# EAGLE board MotorBoard-panel (EAGLE 7.2.0), part 1 of 4
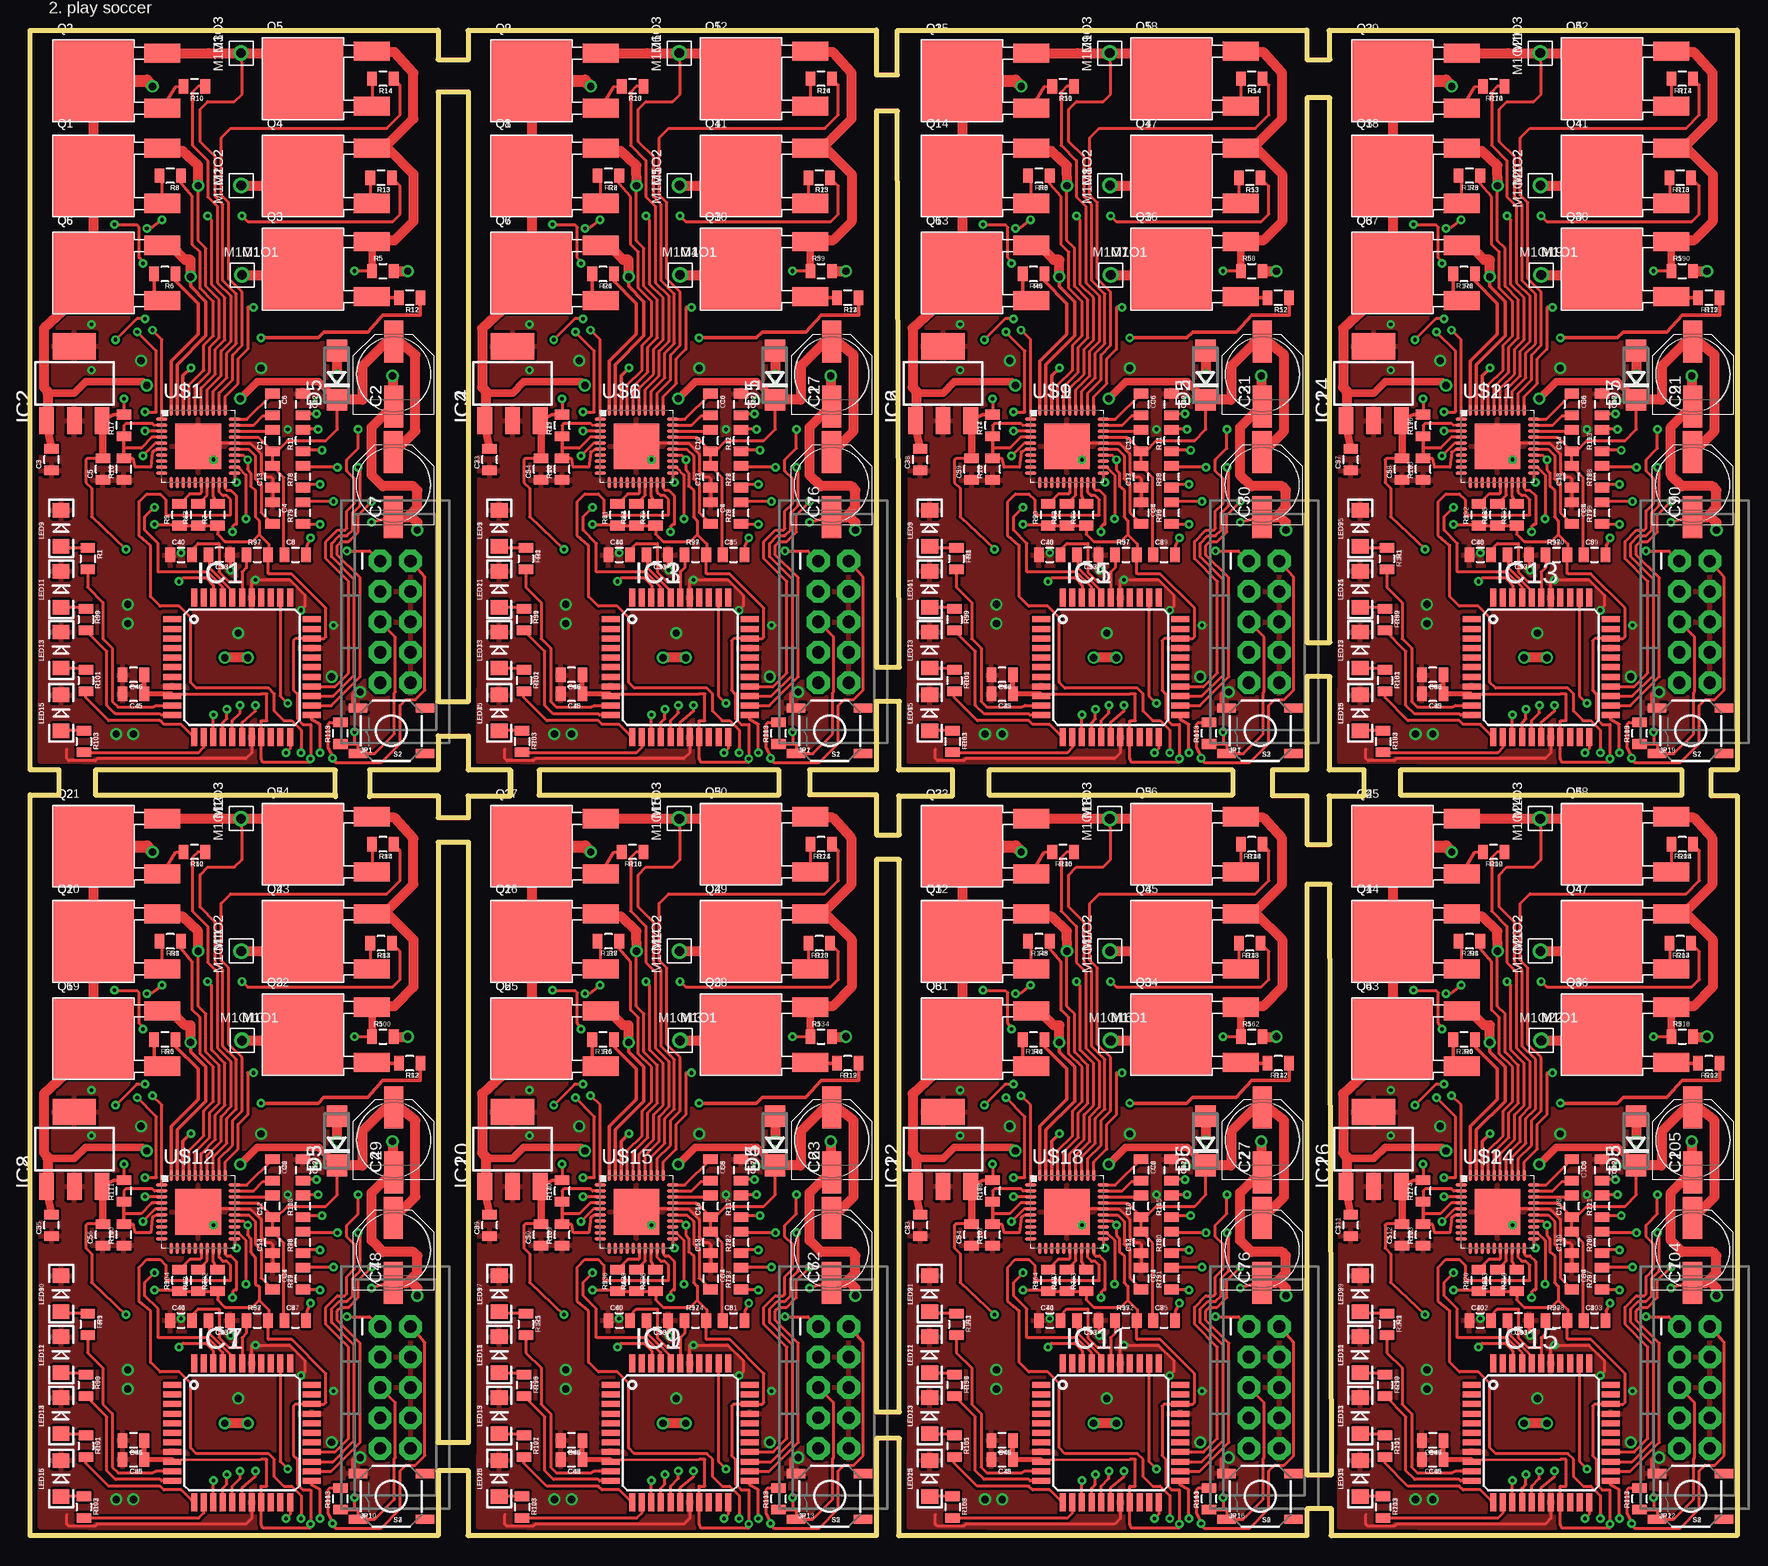
[diagram p0: board, top side]
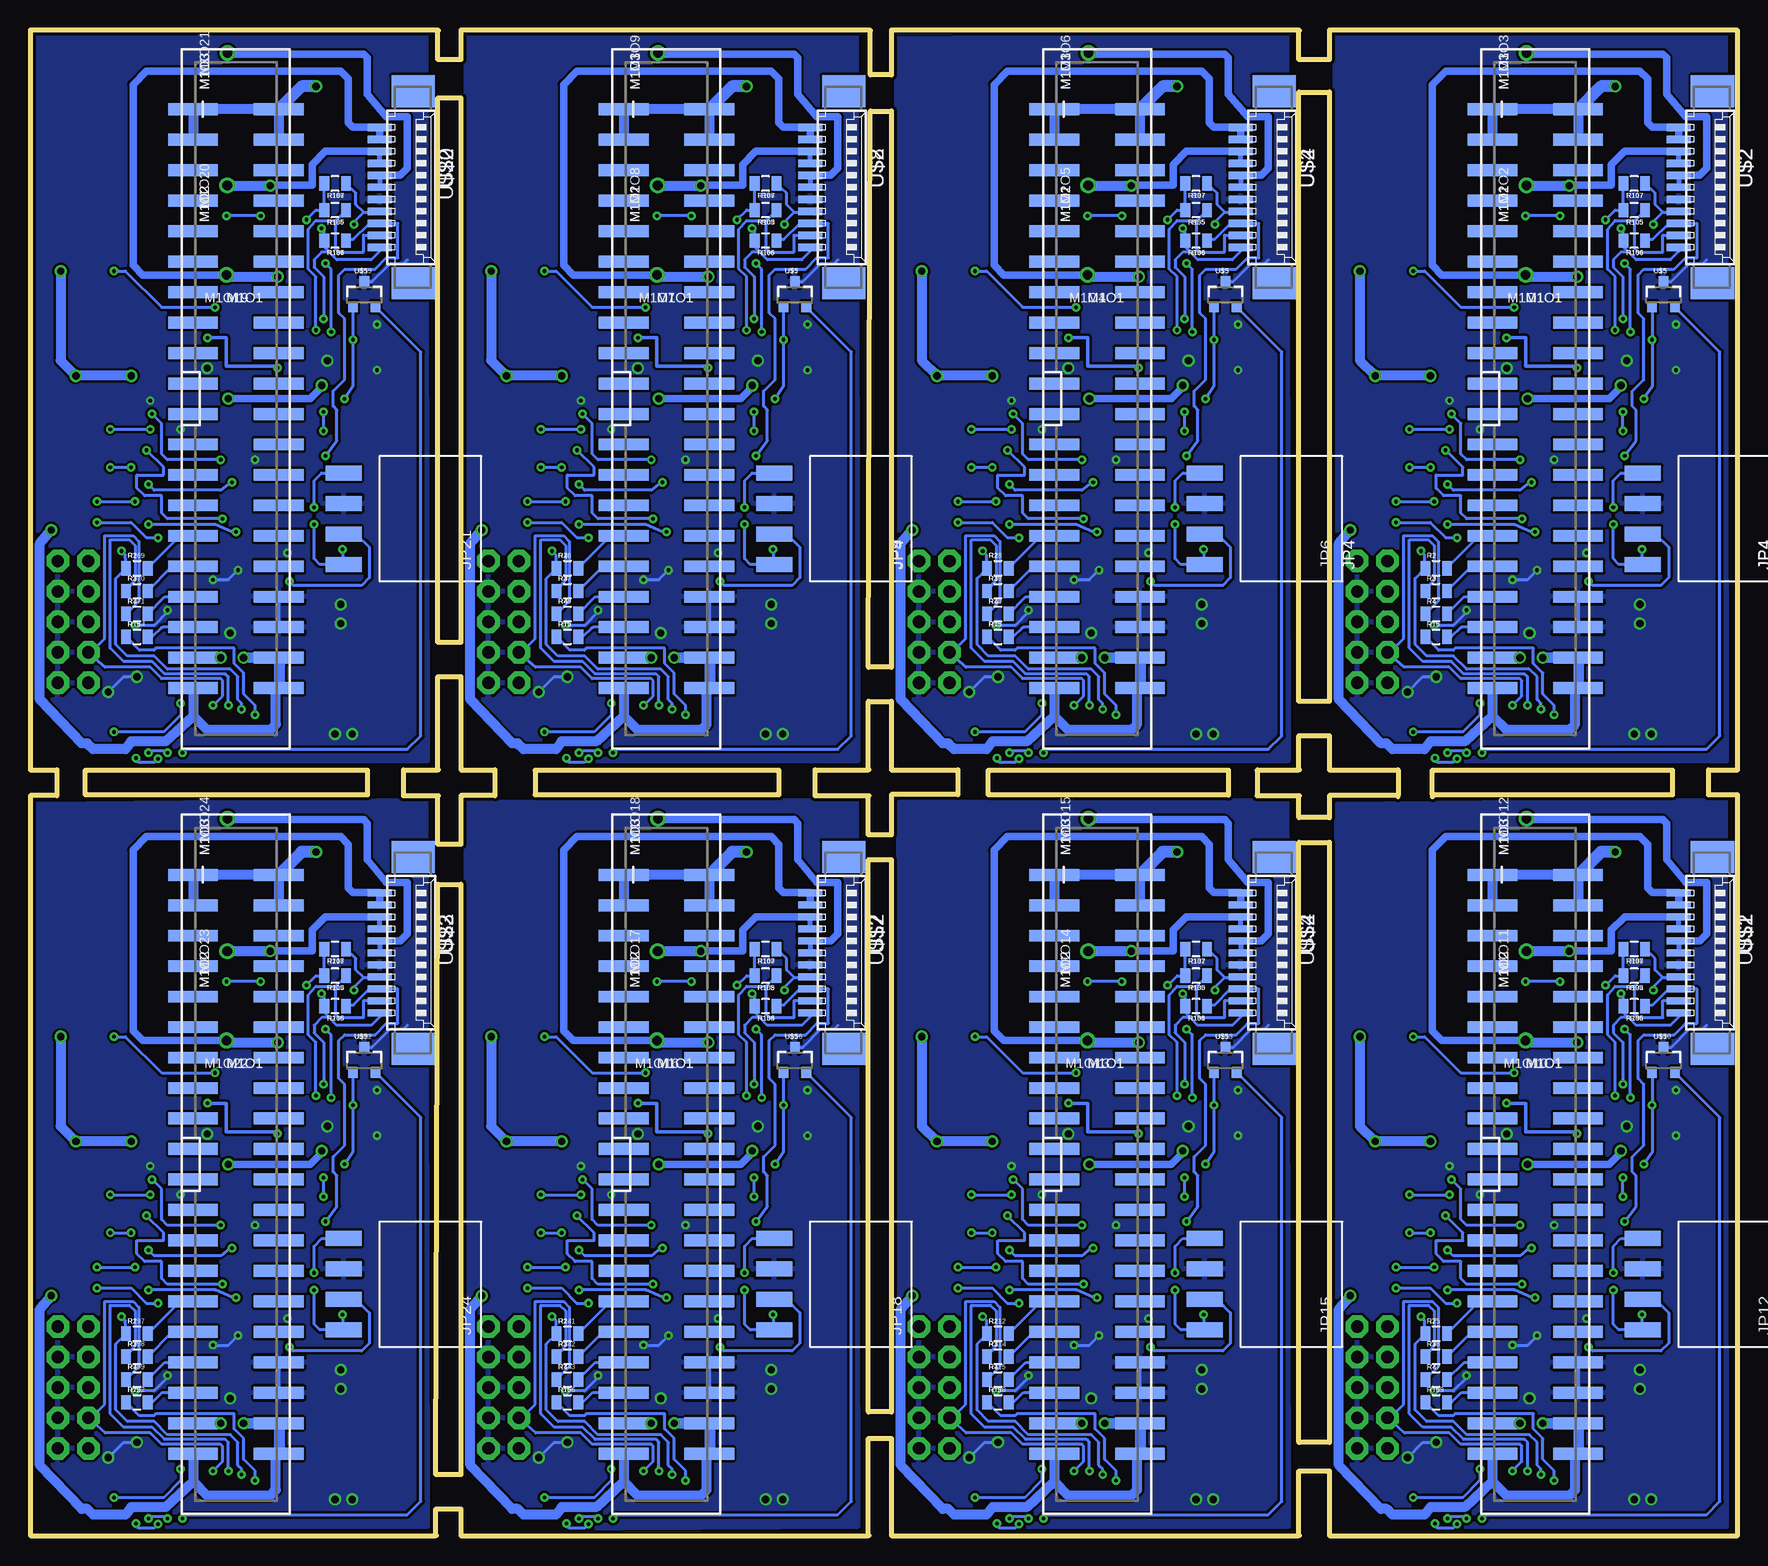
[diagram p1: board, bottom side, seen from below]

Size 142.27 x 125.5 mm. Coordinates in mm from the lower left corner, seen from the top.
Outline: 25.45,61.74 25.45,63.81 5.45,63.81 5.45,61.74 25.45,61.74
Outline: 36.51,63.82 36.56,63.82
Outline: 36.56,63.82 36.56,66.67 34.02,66.67 34.02,63.82 28.3,63.82 28.3,61.68
Outline: 64.98,61.76 64.98,61.74
Outline: 42.43,61.74 42.43,61.7
Outline: 40.01,61.7 40.01,63.82 36.56,63.82
Outline: 72.39,63.82 72.44,63.82
Outline: 72.44,63.82 72.44,69.52 70.53,69.52 70.53,63.82 64.98,63.82 64.98,61.76
Outline: 103.55,63.82 106.41,63.82 106.41,71.59 108.31,71.59 108.31,63.82
Outline: 76.88,61.74 76.88,63.82 72.44,63.82
Outline: 25.45,61.74 25.45,61.59
Outline: 28.3,61.59 28.3,61.68
Outline: 28.3,61.68 34.02,61.68 34.02,59.84 36.56,59.84 36.56,61.66
Outline: 36.51,0 36.56,0
Outline: 36.56,0 36.56,5.39 34.02,5.39 34.02,0 0,0 0,61.74 2.43,61.74 2.43,63.82 0,63.82 0,125.48 34,125.5 34.02,125.5 34.02,123.02 36.56,123.02 36.56,125.48 36.51,125.48 70.51,125.5 70.53,125.5 70.53,121.75 72.28,121.75 72.28,125.48 72.39,125.48 106.39,125.5 106.41,125.5 106.41,123.02 108.31,123.02 108.31,125.48 108.27,125.48 142.27,125.5 142.27,63.82 140.06,63.82
Outline: 36.56,61.66 36.51,61.66
Outline: 36.56,61.66 40.05,61.66 40.05,63.81
Outline: 42.43,61.74 42.43,63.81 62.44,63.81 62.44,61.74 42.43,61.74
Outline: 64.98,61.76 70.53,61.76 70.53,58.41 72.44,58.41 72.44,61.66
Outline: 36.56,0 70.53,0 70.53,8.09 72.44,8.09 72.44,0
Outline: 72.39,0 72.44,0
Outline: 72.44,61.66 72.39,61.66
Outline: 72.44,61.66 76.88,61.66 76.88,63.81
Outline: 103.55,63.81 103.55,61.68 106.41,61.68 106.41,57.62 108.31,57.62 108.31,61.66
Outline: 72.44,0 106.41,0 106.41,2.21 108.47,2.21 108.47,0
Outline: 108.27,63.82 108.31,63.82
Outline: 111.17,61.74 111.17,63.82 108.31,63.82
Outline: 108.43,0 108.47,0
Outline: 108.31,61.66 108.27,61.66
Outline: 108.31,61.66 111.17,61.66 111.17,63.81
Outline: 140.06,63.81 140.06,61.68 142.27,61.68 142.27,0 108.47,0
Outline: 34.02,120.32 34.02,69.52 36.56,69.52 36.56,120.32 34.02,120.32
Outline: 70.53,118.74 70.53,72.38 72.44,72.38 72.28,118.74 70.53,118.74
Outline: 106.41,119.85 106.41,74.44 108.31,74.44 108.31,119.85 106.41,119.85
Outline: 100.22,63.81 79.9,63.81 79.9,61.74 100.22,61.74 100.22,63.81
Outline: 34.02,57.78 34.02,7.77 36.56,7.77 36.56,57.78 34.02,57.78
Outline: 70.53,56.35 70.53,10.31 72.44,10.31 72.44,56.35 70.53,56.35
Outline: 106.41,54.28 106.41,5.07 108.47,5.07 108.47,5.23 108.31,54.28 106.41,54.28
Outline: 137.68,63.81 114.19,63.81 114.19,61.74 137.68,61.74 137.68,63.81
Copper layers (1*16): Top 0.035mm / dielectric 1.5mm / Bottom 0.035mm
Design rules "SparkFun": minimum track width 8mil, minimum drill 10mil, track to track 8mil, track to pad 8mil, pad to pad 8mil, via to via 8mil, smd to smd 8mil, copper to edge 10mil, drill to drill 8mil, minimum pad ring 10mil, minimum via ring 8mil, stop-mask expansion 4mil, vias tented up to drill 0mil, thermal gap 10mil

## Footprints (pad centres in the part's own frame; a part is rotated, then mirrored left to right if it is on the bottom)
0805 = smd 0.8 x 1.2: 1 -0.9,0; 2 0.9,0
PANASONIC_D = smd 3.5 x 1.6: + 2.7,0; - -2.7,0
DO214AC = smd 1.8 x 1.7: A 2.05,0; C -2.05,0
TQFP44 = smd 1.5 x 0.5: 1 -5.8,4; 2 -5.8,3.2; 3 -5.8,2.4; 4 -5.8,1.6; 5 -5.8,0.8; 6 -5.8,0; 7 -5.8,-0.8; 8 -5.8,-1.6; 9 -5.8,-2.4; 10 -5.8,-3.2; 11 -5.8,-4; 23 5.8,-4; 24 5.8,-3.2; 25 5.8,-2.4; 26 5.8,-1.6; 27 5.8,-0.8; 28 5.8,0; 29 5.8,0.8; 30 5.8,1.6; 31 5.8,2.4; 32 5.8,3.2; 33 5.8,4 | smd 0.5 x 1.5: 12 -4,-5.8; 13 -3.2,-5.8; 14 -2.4,-5.8; 15 -1.6,-5.8; 16 -0.8,-5.8; 17 0,-5.8; 18 0.8,-5.8; 19 1.6,-5.8; 20 2.4,-5.8; 21 3.2,-5.8; 22 4,-5.8; 34 4,5.8; 35 3.2,5.8; 36 2.4,5.8; 37 1.6,5.8; 38 0.8,5.8; 39 0,5.8; 40 -0.8,5.8; 41 -1.6,5.8; 42 -2.4,5.8; 43 -3.2,5.8; 44 -4,5.8
SOT223 = smd 1.219 x 2.235: 1 -2.311,-3.099; 2 0,-3.099; 3 2.311,-3.099 | smd 3.6 x 2.2: 4 0,3.099
2X5-SHROUDED-NS = drill 1.016 pad 1.88 octagon: 1 -1.27,5.08; 2 1.27,5.08; 3 -1.27,2.54; 4 1.27,2.54; 5 -1.27,0; 6 1.27,0; 7 -1.27,-2.54; 8 1.27,-2.54; 9 -1.27,-5.08; 10 1.27,-5.08
2X20_SHROUDED_SMT = smd 4.14 x 0.991: 1 -3.569,24.13; 2 3.569,24.13; 3 -3.569,21.59; 4 3.569,21.59; 5 -3.569,19.05; 6 3.569,19.05; 7 -3.569,16.51; 8 3.569,16.51; 9 -3.569,13.97; 10 3.569,13.97; 11 -3.569,11.43; 12 3.569,11.43; 13 -3.569,8.89; 14 3.569,8.89; 15 -3.569,6.35; 16 3.569,6.35; 17 -3.569,3.81; 18 3.569,3.81; 19 -3.569,1.27; 20 3.569,1.27; 21 -3.569,-1.27; 22 3.569,-1.27; 23 -3.569,-3.81; 24 3.569,-3.81; 25 -3.569,-6.35; 26 3.569,-6.35; 27 -3.569,-8.89; 28 3.569,-8.89; 29 -3.569,-11.43; 30 3.569,-11.43; 31 -3.569,-13.97; 32 3.569,-13.97; 33 -3.569,-16.51; 34 3.569,-16.51; 35 -3.569,-19.05; 36 3.569,-19.05; 37 -3.569,-21.59; 38 3.569,-21.59; 39 -3.569,-24.13; 40 3.569,-24.13
1X04_SMD_RA_FEMALE = smd 1.25 x 3: 1 -3.81,7.225; 2 -1.27,7.225; 3 1.27,7.225; 4 3.81,7.225
LED-1206 = smd 1.2 x 1.4: A -1.5,0; C 1.5,0
TESTING_PT = drill 0.8: P$1 0,0
DPAK = smd 6.7 x 6.7: DRAIN 0,0 | smd 3 x 1.6: GATE 5.75,-2.3; SOURCE 5.75,2.3
TACTILE-SWITCH-SMD = smd 1.524 x 0.762: 1 -2.794,1.905; 2 2.794,1.905; 3 -2.794,-1.905; 4 2.794,-1.905
QFN40-6X6 = smd 0.95 x 0.28: 1 -3.025,2.25; 2 -3.025,1.75; 3 -3.025,1.25; 4 -3.025,0.75; 5 -3.025,0.25; 6 -3.025,-0.25; 7 -3.025,-0.75; 8 -3.025,-1.25; 9 -3.025,-1.75; 10 -3.025,-2.25; 21 3.025,-2.25; 22 3.025,-1.75; 23 3.025,-1.25; 24 3.025,-0.75; 25 3.025,-0.25; 26 3.025,0.25; 27 3.025,0.75; 28 3.025,1.25; 29 3.025,1.75; 30 3.025,2.25 | smd 0.28 x 0.95: 11 -2.25,-3.025; 12 -1.75,-3.025; 13 -1.25,-3.025; 14 -0.75,-3.025; 15 -0.25,-3.025; 16 0.25,-3.025; 17 0.75,-3.025; 18 1.25,-3.025; 19 1.75,-3.025; 20 2.25,-3.025; 31 2.25,3.025; 32 1.75,3.025; 33 1.25,3.025; 34 0.75,3.025; 35 0.25,3.025; 36 -0.25,3.025; 37 -0.75,3.025; 38 -1.25,3.025; 39 -1.75,3.025; 40 -2.25,3.025 | smd 3.81 x 3.81: P$3 0,0
GEN3CON = smd 0.61 x 2: 1 5,-2; 2 4,-2; 3 3,-2; 4 2,-2; 5 1,-2; 7 -1,-2; 8 -2,-2; 9 -3,-2; 10 -4,-2; 11 -5,-2 | smd 0.6 x 2: 6 0,-2 | smd 2.68 x 3.6: S1 8,0.8; S2 -8,0.8
SOT23-3 = smd 0.8 x 0.9: 1 -0.95,-1; 2 0.95,-1; 3 0,1.1

## Placement (x,y rotation side)
C1  1uF  [0805]  20.21,91.27 90 top
C2  100uF  [PANASONIC_D]  30.3,96.8 90 top
C3  .1uF  [0805]  1.79,89.68 90 top
C4  1uF  [0805]  20.21,85.24 270 top
C5  .1uF  [0805]  6.08,88.89 90 top
C6  1uF  [0805]  20.21,94.29 270 top
C7  100uF  [PANASONIC_D]  30.28,87.59 90 top
C8  .1uF  [0805]  22.11,81.75 0 top
C9  1uF  [0805]  56.72,85.24 270 top
C10  1uF  [0805]  56.72,94.29 270 top
C11  .1uF  [0805]  52.28,81.75 180 top
C12  .1uF  [0805]  22.75,94.29 270 top
C13  0.1uF  [0805]  20.21,88.25 90 top
C14  .1uF  [0805]  49.1,81.75 0 top
C15  .1uF  [0805]  58.63,81.75 0 top
C16  100uF  [PANASONIC_D]  66.79,87.59 90 top
C17  100uF  [PANASONIC_D]  66.82,96.8 90 top
C18  1uF  [0805]  45.13,70.16 180 top
C19  .01uF  [0805]  45.13,71.74 180 top
C20  1uF  [0805]  56.72,91.27 90 top
C21  .1uF  [0805]  59.26,94.29 270 top
C22  0.1uF  [0805]  56.72,88.25 90 top
C23  .1uF  [0805]  38.31,89.68 90 top
C24  .1uF  [0805]  42.59,88.89 90 top
C25  1uF  [0805]  92.6,85.24 270 top
C26  1uF  [0805]  92.6,94.29 270 top
C27  .1uF  [0805]  88.15,81.75 180 top
C28  .1uF  [0805]  84.98,81.75 0 top
C29  .1uF  [0805]  94.5,81.75 0 top
C30  100uF  [PANASONIC_D]  102.67,87.59 90 top
C31  100uF  [PANASONIC_D]  102.69,96.8 90 top
C32  1uF  [0805]  81.01,70.16 180 top
C33  .1uF  [0805]  15.76,81.75 180 top
C34  .01uF  [0805]  81.01,71.74 180 top
C35  1uF  [0805]  92.6,91.27 90 top
C36  .1uF  [0805]  95.14,94.29 270 top
C37  0.1uF  [0805]  92.6,88.25 90 top
C38  .1uF  [0805]  74.18,89.68 90 top
C39  .1uF  [0805]  78.47,88.89 90 top
C40  .1uF  [0805]  12.59,81.75 0 top
C41  1uF  [0805]  20.21,21.42 270 top
C42  1uF  [0805]  20.21,30.47 270 top
C43  .1uF  [0805]  15.76,17.93 180 top
C44  .1uF  [0805]  12.59,17.93 0 top
C45  1uF  [0805]  8.62,70.16 180 top
C46  .01uF  [0805]  8.62,71.74 180 top
C47  .1uF  [0805]  22.11,17.93 0 top
C48  100uF  [PANASONIC_D]  30.28,23.78 90 top
C49  100uF  [PANASONIC_D]  30.3,32.98 90 top
C50  1uF  [0805]  8.62,6.34 180 top
C51  .01uF  [0805]  8.62,7.93 180 top
C52  1uF  [0805]  20.21,27.45 90 top
C53  .1uF  [0805]  22.75,30.47 270 top
C54  0.1uF  [0805]  20.21,24.44 90 top
C55  .1uF  [0805]  1.79,25.87 90 top
C56  .1uF  [0805]  6.08,25.07 90 top
C57  1uF  [0805]  56.72,21.42 270 top
C58  1uF  [0805]  56.72,30.47 270 top
C59  .1uF  [0805]  52.28,17.93 180 top
C60  .1uF  [0805]  49.1,17.93 0 top
C61  .1uF  [0805]  58.63,17.93 0 top
C62  100uF  [PANASONIC_D]  66.79,23.78 90 top
C63  100uF  [PANASONIC_D]  66.82,32.98 90 top
C64  1uF  [0805]  45.13,6.34 180 top
C65  .01uF  [0805]  45.13,7.93 180 top
C66  1uF  [0805]  56.72,27.45 90 top
C67  .1uF  [0805]  59.26,30.47 270 top
C68  0.1uF  [0805]  56.72,24.44 90 top
C69  .1uF  [0805]  38.31,25.87 90 top
C70  .1uF  [0805]  42.59,25.07 90 top
C71  1uF  [0805]  92.6,21.42 270 top
C72  1uF  [0805]  92.6,30.47 270 top
C73  .1uF  [0805]  88.15,17.93 180 top
C74  .1uF  [0805]  84.98,17.93 0 top
C75  .1uF  [0805]  94.5,17.93 0 top
C76  100uF  [PANASONIC_D]  102.67,23.78 90 top
C77  100uF  [PANASONIC_D]  102.69,32.98 90 top
C78  1uF  [0805]  81.01,6.34 180 top
C79  .01uF  [0805]  81.01,7.93 180 top
C80  1uF  [0805]  92.6,27.45 90 top
C81  .1uF  [0805]  95.14,30.47 270 top
C82  0.1uF  [0805]  92.6,24.44 90 top
C83  .1uF  [0805]  74.18,25.87 90 top
C84  .1uF  [0805]  78.47,25.07 90 top
C85  1uF  [0805]  128.48,85.24 270 top
C86  1uF  [0805]  128.48,94.29 270 top
C87  .1uF  [0805]  124.03,81.75 180 top
C88  .1uF  [0805]  120.86,81.75 0 top
C89  .1uF  [0805]  130.38,81.75 0 top
C90  100uF  [PANASONIC_D]  138.55,87.59 90 top
C91  100uF  [PANASONIC_D]  138.57,96.8 90 top
C92  1uF  [0805]  116.89,70.16 180 top
C93  .01uF  [0805]  116.89,71.74 180 top
C94  1uF  [0805]  128.48,91.27 90 top
C95  .1uF  [0805]  131.02,94.29 270 top
C96  0.1uF  [0805]  128.48,88.25 90 top
C97  .1uF  [0805]  110.06,89.68 90 top
C98  .1uF  [0805]  114.35,88.89 90 top
C99  1uF  [0805]  128.48,21.42 270 top
C100  1uF  [0805]  128.48,30.47 270 top
C101  .1uF  [0805]  124.03,17.93 180 top
C102  .1uF  [0805]  120.86,17.93 0 top
C103  .1uF  [0805]  130.38,17.93 0 top
C104  100uF  [PANASONIC_D]  138.55,23.78 90 top
C105  100uF  [PANASONIC_D]  138.57,32.98 90 top
C106  1uF  [0805]  116.89,6.34 180 top
C107  .01uF  [0805]  116.89,7.93 180 top
C108  1uF  [0805]  128.48,27.45 90 top
C109  .1uF  [0805]  131.02,30.47 270 top
C110  0.1uF  [0805]  128.48,24.44 90 top
C111  .1uF  [0805]  110.06,25.87 90 top
C112  .1uF  [0805]  114.35,25.07 90 top
D1  DIODE-ZENERDO214AC  [DO214AC]  62.09,96.72 90 top
D2  DIODE-ZENERDO214AC  [DO214AC]  97.97,96.72 90 top
D3  DIODE-ZENERDO214AC  [DO214AC]  25.58,32.91 90 top
D4  DIODE-ZENERDO214AC  [DO214AC]  62.09,32.91 90 top
D5  DIODE-ZENERDO214AC  [DO214AC]  25.58,96.72 90 top
D6  DIODE-ZENERDO214AC  [DO214AC]  97.97,32.91 90 top
D7  DIODE-ZENERDO214AC  [DO214AC]  133.85,96.72 90 top
D8  DIODE-ZENERDO214AC  [DO214AC]  133.85,32.91 90 top
FRAME7  FRAME-LETTER  [CREATIVE_COMMONS]  -67.92,133.99 0 top  (outside the outline)
GEN_4_REV_A  Fall 2015  [LOGO]  3.54,133.22 0 top  (outside the outline)
IC1  XMEGA16A4A  [TQFP44]  17.67,72.38 0 top
IC2  [SOT223]  3.7,96.03 0 top
IC3  XMEGA16A4A  [TQFP44]  54.18,72.38 0 top
IC4  [SOT223]  40.21,96.03 0 top
IC5  XMEGA16A4A  [TQFP44]  90.06,72.38 0 top
IC6  [SOT223]  76.09,96.03 0 top
IC7  XMEGA16A4A  [TQFP44]  17.67,8.56 0 top
IC8  [SOT223]  3.7,32.22 0 top
IC9  XMEGA16A4A  [TQFP44]  54.18,8.56 0 top
IC10  [SOT223]  40.21,32.22 0 top
IC11  XMEGA16A4A  [TQFP44]  90.06,8.56 0 top
IC12  [SOT223]  76.09,32.22 0 top
IC13  XMEGA16A4A  [TQFP44]  125.94,72.38 0 top
IC14  [SOT223]  111.97,96.03 0 top
IC15  XMEGA16A4A  [TQFP44]  125.94,8.56 0 top
IC16  [SOT223]  111.97,32.22 0 top
JP1  [2X5-SHROUDED-NS]  30.45,76.16 0 top
JP2  [2X5-SHROUDED-NS]  66.96,76.16 0 top
JP3  M20X2SHROUDED_SMT  [2X20_SHROUDED_SMT]  16.88,94.76 0 bottom
JP4  [1X04_SMD_RA_FEMALE]  0.68,84.76 90 bottom
JP5  M20X2SHROUDED_SMT  [2X20_SHROUDED_SMT]  53.39,94.76 0 bottom
JP6  [1X04_SMD_RA_FEMALE]  37.2,84.76 90 bottom
JP7  [2X5-SHROUDED-NS]  102.83,76.16 0 top
JP8  M20X2SHROUDED_SMT  [2X20_SHROUDED_SMT]  89.27,94.76 0 bottom
JP9  [1X04_SMD_RA_FEMALE]  73.07,84.76 90 bottom
JP10  [2X5-SHROUDED-NS]  30.45,12.34 0 top
JP11  M20X2SHROUDED_SMT  [2X20_SHROUDED_SMT]  16.88,30.95 0 bottom
JP12  [1X04_SMD_RA_FEMALE]  0.68,20.94 90 bottom
JP13  [2X5-SHROUDED-NS]  66.96,12.34 0 top
JP14  M20X2SHROUDED_SMT  [2X20_SHROUDED_SMT]  53.39,30.95 0 bottom
JP15  [1X04_SMD_RA_FEMALE]  37.2,20.94 90 bottom
JP16  [2X5-SHROUDED-NS]  102.83,12.34 0 top
JP17  M20X2SHROUDED_SMT  [2X20_SHROUDED_SMT]  89.27,30.95 0 bottom
JP18  [1X04_SMD_RA_FEMALE]  73.07,20.94 90 bottom
JP19  [2X5-SHROUDED-NS]  138.71,76.16 0 top
JP20  M20X2SHROUDED_SMT  [2X20_SHROUDED_SMT]  125.14,94.76 0 bottom
JP21  [1X04_SMD_RA_FEMALE]  108.95,84.76 90 bottom
JP22  [2X5-SHROUDED-NS]  138.71,12.34 0 top
JP23  M20X2SHROUDED_SMT  [2X20_SHROUDED_SMT]  125.14,30.95 0 bottom
JP24  [1X04_SMD_RA_FEMALE]  108.95,20.94 90 bottom
LED1  [LED-1206]  39.1,83.97 90 top
LED2  [LED-1206]  39.1,78.89 90 top
LED3  [LED-1206]  39.1,73.81 90 top
LED4  [LED-1206]  39.1,68.57 90 top
LED5  [LED-1206]  74.98,83.97 90 top
LED6  [LED-1206]  74.98,78.89 90 top
LED7  [LED-1206]  74.98,73.81 90 top
LED8  [LED-1206]  74.98,68.57 90 top
LED9  [LED-1206]  2.59,83.97 90 top
LED10  [LED-1206]  2.59,20.15 90 top
LED11  [LED-1206]  2.59,78.89 90 top
LED12  [LED-1206]  2.59,15.07 90 top
LED13  [LED-1206]  2.59,73.81 90 top
LED14  [LED-1206]  2.59,9.99 90 top
LED15  [LED-1206]  2.59,68.57 90 top
LED16  [LED-1206]  2.59,4.75 90 top
LED17  [LED-1206]  39.1,20.15 90 top
LED18  [LED-1206]  39.1,15.07 90 top
LED19  [LED-1206]  39.1,9.99 90 top
LED20  [LED-1206]  39.1,4.75 90 top
LED21  [LED-1206]  74.98,20.15 90 top
LED22  [LED-1206]  74.98,15.07 90 top
LED23  [LED-1206]  74.98,9.99 90 top
LED24  [LED-1206]  74.98,4.75 90 top
LED25  [LED-1206]  110.86,83.97 90 top
LED26  [LED-1206]  110.86,78.89 90 top
LED27  [LED-1206]  110.86,73.81 90 top
LED28  [LED-1206]  110.86,68.57 90 top
LED29  [LED-1206]  110.86,20.15 90 top
LED30  [LED-1206]  110.86,15.07 90 top
LED31  [LED-1206]  110.86,9.99 90 top
LED32  [LED-1206]  110.86,4.75 90 top
M1O1  TEST_PT  [TESTING_PT]  17.67,105.08 0 top
M1O2  TEST_PT  [TESTING_PT]  17.6,112.53 90 top
M1O3  TEST_PT  [TESTING_PT]  17.59,123.58 90 top
M1O4  TEST_PT  [TESTING_PT]  54.18,105.08 0 top
M1O5  TEST_PT  [TESTING_PT]  54.12,112.53 90 top
M1O6  TEST_PT  [TESTING_PT]  54.1,123.58 90 top
M1O7  TEST_PT  [TESTING_PT]  90.06,105.08 0 top
M1O8  TEST_PT  [TESTING_PT]  89.99,112.53 90 top
M1O9  TEST_PT  [TESTING_PT]  89.98,123.58 90 top
M1O10  TEST_PT  [TESTING_PT]  17.67,41.26 0 top
M1O11  TEST_PT  [TESTING_PT]  17.6,48.71 90 top
M1O12  TEST_PT  [TESTING_PT]  17.59,59.76 90 top
M1O13  TEST_PT  [TESTING_PT]  54.18,41.26 0 top
M1O14  TEST_PT  [TESTING_PT]  54.12,48.71 90 top
M1O15  TEST_PT  [TESTING_PT]  54.1,59.76 90 top
M1O16  TEST_PT  [TESTING_PT]  90.06,41.26 0 top
M1O17  TEST_PT  [TESTING_PT]  89.99,48.71 90 top
M1O18  TEST_PT  [TESTING_PT]  89.98,59.76 90 top
M1O19  TEST_PT  [TESTING_PT]  125.94,105.08 0 top
M1O20  TEST_PT  [TESTING_PT]  125.87,112.53 90 top
M1O21  TEST_PT  [TESTING_PT]  125.86,123.58 90 top
M1O22  TEST_PT  [TESTING_PT]  125.94,41.26 0 top
M1O23  TEST_PT  [TESTING_PT]  125.87,48.71 90 top
M1O24  TEST_PT  [TESTING_PT]  125.86,59.76 90 top
Q1  [DPAK]  5.29,113.34 0 top
Q2  [DPAK]  5.29,121.27 0 top
Q3  [DPAK]  22.75,105.56 0 top
Q4  [DPAK]  22.75,113.34 0 top
Q5  [DPAK]  22.75,121.43 0 top
Q6  [DPAK]  5.29,105.24 0 top
Q7  [DPAK]  41.8,105.24 0 top
Q8  [DPAK]  41.8,113.34 0 top
Q9  [DPAK]  41.8,121.27 0 top
Q10  [DPAK]  59.26,105.56 0 top
Q11  [DPAK]  59.26,113.34 0 top
Q12  [DPAK]  59.26,121.43 0 top
Q13  [DPAK]  77.68,105.24 0 top
Q14  [DPAK]  77.68,113.34 0 top
Q15  [DPAK]  77.68,121.27 0 top
Q16  [DPAK]  95.14,105.56 0 top
Q17  [DPAK]  95.14,113.34 0 top
Q18  [DPAK]  95.14,121.43 0 top
Q19  [DPAK]  5.29,41.42 0 top
Q20  [DPAK]  5.29,49.52 0 top
Q21  [DPAK]  5.29,57.46 0 top
Q22  [DPAK]  22.75,41.74 0 top
Q23  [DPAK]  22.75,49.52 0 top
Q24  [DPAK]  22.75,57.62 0 top
Q25  [DPAK]  41.8,41.42 0 top
Q26  [DPAK]  41.8,49.52 0 top
Q27  [DPAK]  41.8,57.46 0 top
Q28  [DPAK]  59.26,41.74 0 top
Q29  [DPAK]  59.26,49.52 0 top
Q30  [DPAK]  59.26,57.62 0 top
Q31  [DPAK]  77.68,41.42 0 top
Q32  [DPAK]  77.68,49.52 0 top
Q33  [DPAK]  77.68,57.46 0 top
Q34  [DPAK]  95.14,41.74 0 top
Q35  [DPAK]  95.14,49.52 0 top
Q36  [DPAK]  95.14,57.62 0 top
Q37  [DPAK]  113.55,105.24 0 top
Q38  [DPAK]  113.55,113.34 0 top
Q39  [DPAK]  113.55,121.27 0 top
Q40  [DPAK]  131.02,105.56 0 top
Q41  [DPAK]  131.02,113.34 0 top
Q42  [DPAK]  131.02,121.43 0 top
Q43  [DPAK]  113.55,41.42 0 top
Q44  [DPAK]  113.55,49.52 0 top
Q45  [DPAK]  113.55,57.46 0 top
Q46  [DPAK]  131.02,41.74 0 top
Q47  [DPAK]  131.02,49.52 0 top
Q48  [DPAK]  131.02,57.62 0 top
R1  1k  [0805]  4.81,81.43 270 top
R2  4.7k  [0805]  25.13,80.63 0 bottom
R3  4.7k  [0805]  25.13,78.73 0 bottom
R4  4.7k  [0805]  25.13,76.82 0 bottom
R5  0.05  [0805]  29.42,105.4 0 top
R6  240  [0805]  11.24,105.16 180 top
R7  30k  [0805]  15.63,85.09 90 top
R8  240  [0805]  11.69,113.35 180 top
R9  15k  [0805]  12.46,85.09 90 top
R10  240  [0805]  13.7,120.8 180 top
R11  1k  [0805]  22.75,91.27 90 top
R12  240  [0805]  31.64,103.18 180 top
R13  240  [0805]  29.26,113.18 180 top
R14  240  [0805]  29.42,121.43 180 top
R15  4.7k  [0805]  25.13,74.92 0 bottom
R16  2K  [0805]  7.83,88.89 90 top
R17  2K  [0805]  7.83,92.54 90 top
R18  4.7k  [0805]  61.64,80.63 0 bottom
R19  4.7k  [0805]  61.64,78.73 0 bottom
R20  4.7k  [0805]  61.64,76.82 0 bottom
R21  240  [0805]  47.75,105.16 180 top
R22  240  [0805]  48.2,113.35 180 top
R23  240  [0805]  50.21,120.8 180 top
R24  240  [0805]  68.15,103.18 180 top
R25  240  [0805]  65.77,113.18 180 top
R26  240  [0805]  65.93,121.43 180 top
R27  1k  [0805]  59.26,88.25 90 top
R28  1k  [0805]  59.26,85.24 90 top
R29  10k  [0805]  55.45,81.75 0 top
R30  1k  [0805]  41.32,81.43 270 top
R31  1k  [0805]  41.16,76.35 270 top
R32  1k  [0805]  41.16,71.27 270 top
R33  1k  [0805]  41.01,66.19 270 top
R34  30k  [0805]  50.54,85.09 90 top
R35  10k  [0805]  45.13,110.48 180 bottom
R36  10k  [0805]  45.13,107.94 180 bottom
R37  10k  [0805]  45.13,112.7 180 bottom
R38  10k  [0805]  62.38,66.88 90 top
R39  0.05  [0805]  65.93,105.4 0 top
R40  30k  [0805]  52.14,85.09 90 top
R41  15k  [0805]  48.97,85.09 90 top
R42  1k  [0805]  59.26,91.27 90 top
R43  4.7k  [0805]  61.64,74.92 0 bottom
R44  2K  [0805]  44.34,88.89 90 top
R45  2K  [0805]  44.34,92.54 90 top
R46  4.7k  [0805]  97.52,80.63 0 bottom
R47  4.7k  [0805]  97.52,78.73 0 bottom
R48  4.7k  [0805]  97.52,76.82 0 bottom
R49  240  [0805]  83.63,105.16 180 top
R50  240  [0805]  84.08,113.35 180 top
R51  240  [0805]  86.09,120.8 180 top
R52  240  [0805]  104.03,103.18 180 top
R53  240  [0805]  101.65,113.18 180 top
R54  240  [0805]  101.81,121.43 180 top
R55  1k  [0805]  95.14,88.25 90 top
R56  1k  [0805]  95.14,85.24 90 top
R57  10k  [0805]  91.33,81.75 0 top
R58  1k  [0805]  77.2,81.43 270 top
R59  1k  [0805]  77.04,76.35 270 top
R60  1k  [0805]  77.04,71.27 270 top
R61  1k  [0805]  76.88,66.19 270 top
R62  30k  [0805]  86.41,85.09 90 top
R63  30k  [0805]  14.02,85.09 90 top
R64  10k  [0805]  81.01,110.48 180 bottom
R65  10k  [0805]  81.01,107.94 180 bottom
R66  10k  [0805]  81.01,112.7 180 bottom
R67  10k  [0805]  98.26,66.88 90 top
R68  0.05  [0805]  101.81,105.4 0 top
R69  30k  [0805]  88.02,85.09 90 top
R70  15k  [0805]  84.85,85.09 90 top
R71  1k  [0805]  95.14,91.27 90 top
R72  4.7k  [0805]  97.52,74.92 0 bottom
R73  2K  [0805]  80.22,88.89 90 top
R74  2K  [0805]  80.22,92.54 90 top
R75  4.7k  [0805]  25.13,16.82 0 bottom
R76  4.7k  [0805]  25.13,14.91 0 bottom
R77  4.7k  [0805]  25.13,13.01 0 bottom
R78  1k  [0805]  22.75,88.25 90 top
R79  1k  [0805]  22.75,85.24 90 top
R80  240  [0805]  11.24,41.34 180 top
R81  240  [0805]  11.69,49.53 180 top
R82  240  [0805]  13.7,56.98 180 top
R83  240  [0805]  31.64,39.36 180 top
R84  240  [0805]  29.26,49.36 180 top
R85  240  [0805]  29.42,57.62 180 top
R86  1k  [0805]  22.75,24.44 90 top
R87  1k  [0805]  22.75,21.42 90 top
R88  10k  [0805]  18.94,17.93 0 top
R89  1k  [0805]  4.81,17.61 270 top
R90  1k  [0805]  4.65,12.53 270 top
R91  1k  [0805]  4.65,7.45 270 top
R92  1k  [0805]  4.49,2.37 270 top
R93  30k  [0805]  14.02,21.27 90 top
R94  10k  [0805]  8.62,46.66 180 bottom
R95  10k  [0805]  8.62,44.12 180 bottom
R96  10k  [0805]  8.62,48.88 180 bottom
R97  10k  [0805]  18.94,81.75 0 top
R98  10k  [0805]  25.87,3.06 90 top
R99  1k  [0805]  4.65,76.35 270 top
R100  0.05  [0805]  29.42,41.58 0 top
R101  1k  [0805]  4.65,71.27 270 top
R102  30k  [0805]  15.63,21.27 90 top
R103  1k  [0805]  4.49,66.19 270 top
R104  15k  [0805]  12.46,21.27 90 top
R105  10k  [0805]  8.62,110.48 180 bottom
R106  10k  [0805]  8.62,107.94 180 bottom
R107  10k  [0805]  8.62,112.7 180 bottom
R108  1k  [0805]  22.75,27.45 90 top
R109  4.7k  [0805]  25.13,11.1 0 bottom
R110  2K  [0805]  7.83,25.07 90 top
R111  2K  [0805]  7.83,28.72 90 top
R112  4.7k  [0805]  61.64,16.82 0 bottom
R113  10k  [0805]  25.87,66.88 90 top
R114  4.7k  [0805]  61.64,14.91 0 bottom
R115  4.7k  [0805]  61.64,13.01 0 bottom
R116  240  [0805]  47.75,41.34 180 top
R117  240  [0805]  48.2,49.53 180 top
R118  240  [0805]  50.21,56.98 180 top
R119  240  [0805]  68.15,39.36 180 top
R120  240  [0805]  65.77,49.36 180 top
R121  240  [0805]  65.93,57.62 180 top
R122  1k  [0805]  59.26,24.44 90 top
R123  1k  [0805]  59.26,21.42 90 top
R124  10k  [0805]  55.45,17.93 0 top
R125  1k  [0805]  41.32,17.61 270 top
R126  1k  [0805]  41.16,12.53 270 top
R127  1k  [0805]  41.16,7.45 270 top
R128  1k  [0805]  41.01,2.37 270 top
R129  30k  [0805]  50.54,21.27 90 top
R130  10k  [0805]  45.13,46.66 180 bottom
R131  10k  [0805]  45.13,44.12 180 bottom
R132  10k  [0805]  45.13,48.88 180 bottom
R133  10k  [0805]  62.38,3.06 90 top
R134  0.05  [0805]  65.93,41.58 0 top
R135  30k  [0805]  52.14,21.27 90 top
R136  15k  [0805]  48.97,21.27 90 top
R137  1k  [0805]  59.26,27.45 90 top
R138  4.7k  [0805]  61.64,11.1 0 bottom
R139  2K  [0805]  44.34,25.07 90 top
R140  2K  [0805]  44.34,28.72 90 top
R141  4.7k  [0805]  97.52,16.82 0 bottom
R142  4.7k  [0805]  97.52,14.91 0 bottom
R143  4.7k  [0805]  97.52,13.01 0 bottom
R144  240  [0805]  83.63,41.34 180 top
R145  240  [0805]  84.08,49.53 180 top
R146  240  [0805]  86.09,56.98 180 top
R147  240  [0805]  104.03,39.36 180 top
R148  240  [0805]  101.65,49.36 180 top
R149  240  [0805]  101.81,57.62 180 top
R150  1k  [0805]  95.14,24.44 90 top
R151  1k  [0805]  95.14,21.42 90 top
R152  10k  [0805]  91.33,17.93 0 top
R153  1k  [0805]  77.2,17.61 270 top
R154  1k  [0805]  77.04,12.53 270 top
R155  1k  [0805]  77.04,7.45 270 top
R156  1k  [0805]  76.88,2.37 270 top
R157  30k  [0805]  86.41,21.27 90 top
R158  10k  [0805]  81.01,46.66 180 bottom
R159  10k  [0805]  81.01,44.12 180 bottom
R160  10k  [0805]  81.01,48.88 180 bottom
R161  10k  [0805]  98.26,3.06 90 top
R162  0.05  [0805]  101.81,41.58 0 top
R163  30k  [0805]  88.02,21.27 90 top
R164  15k  [0805]  84.85,21.27 90 top
R165  1k  [0805]  95.14,27.45 90 top
R166  4.7k  [0805]  97.52,11.1 0 bottom
R167  2K  [0805]  80.22,25.07 90 top
R168  2K  [0805]  80.22,28.72 90 top
R169  4.7k  [0805]  133.4,80.63 0 bottom
R170  4.7k  [0805]  133.4,78.73 0 bottom
R171  4.7k  [0805]  133.4,76.82 0 bottom
R172  240  [0805]  119.51,105.16 180 top
R173  240  [0805]  119.95,113.35 180 top
R174  240  [0805]  121.97,120.8 180 top
R175  240  [0805]  139.91,103.18 180 top
R176  240  [0805]  137.53,113.18 180 top
R177  240  [0805]  137.68,121.43 180 top
R178  1k  [0805]  131.02,88.25 90 top
R179  1k  [0805]  131.02,85.24 90 top
R180  10k  [0805]  127.21,81.75 0 top
R181  1k  [0805]  113.08,81.43 270 top
R182  1k  [0805]  112.92,76.35 270 top
R183  1k  [0805]  112.92,71.27 270 top
R184  1k  [0805]  112.76,66.19 270 top
R185  30k  [0805]  122.29,85.09 90 top
R186  10k  [0805]  116.89,110.48 180 bottom
R187  10k  [0805]  116.89,107.94 180 bottom
R188  10k  [0805]  116.89,112.7 180 bottom
R189  10k  [0805]  134.14,66.88 90 top
R190  0.05  [0805]  137.68,105.4 0 top
R191  30k  [0805]  123.89,85.09 90 top
R192  15k  [0805]  120.73,85.09 90 top
R193  1k  [0805]  131.02,91.27 90 top
R194  4.7k  [0805]  133.4,74.92 0 bottom
R195  2K  [0805]  116.09,88.89 90 top
R196  2K  [0805]  116.09,92.54 90 top
R197  4.7k  [0805]  133.4,16.82 0 bottom
R198  4.7k  [0805]  133.4,14.91 0 bottom
R199  4.7k  [0805]  133.4,13.01 0 bottom
R200  240  [0805]  119.51,41.34 180 top
R201  240  [0805]  119.95,49.53 180 top
R202  240  [0805]  121.97,56.98 180 top
R203  240  [0805]  139.91,39.36 180 top
R204  240  [0805]  137.53,49.36 180 top
R205  240  [0805]  137.68,57.62 180 top
R206  1k  [0805]  131.02,24.44 90 top
R207  1k  [0805]  131.02,21.42 90 top
R208  10k  [0805]  127.21,17.93 0 top
R209  1k  [0805]  113.08,17.61 270 top
R210  1k  [0805]  112.92,12.53 270 top
R211  1k  [0805]  112.92,7.45 270 top
R212  1k  [0805]  112.76,2.37 270 top
R213  30k  [0805]  122.29,21.27 90 top
R214  10k  [0805]  116.89,46.66 180 bottom
R215  10k  [0805]  116.89,44.12 180 bottom
R216  10k  [0805]  116.89,48.88 180 bottom
R217  10k  [0805]  134.14,3.06 90 top
R218  0.05  [0805]  137.68,41.58 0 top
R219  30k  [0805]  123.89,21.27 90 top
R220  15k  [0805]  120.73,21.27 90 top
R221  1k  [0805]  131.02,27.45 90 top
R222  4.7k  [0805]  133.4,11.1 0 bottom
R223  2K  [0805]  116.09,25.07 90 top
R224  2K  [0805]  116.09,28.72 90 top
S1  TAC_SWITCHSMD  [TACTILE-SWITCH-SMD]  66.63,67.08 180 top
S2  TAC_SWITCHSMD  [TACTILE-SWITCH-SMD]  30.12,67.08 180 top
S3  TAC_SWITCHSMD  [TACTILE-SWITCH-SMD]  102.51,67.08 180 top
S4  TAC_SWITCHSMD  [TACTILE-SWITCH-SMD]  30.12,3.26 180 top
S5  TAC_SWITCHSMD  [TACTILE-SWITCH-SMD]  66.63,3.26 180 top
S6  TAC_SWITCHSMD  [TACTILE-SWITCH-SMD]  102.51,3.26 180 top
S7  TAC_SWITCHSMD  [TACTILE-SWITCH-SMD]  138.38,67.08 180 top
S8  TAC_SWITCHSMD  [TACTILE-SWITCH-SMD]  138.38,3.26 180 top
U$1  DRV8307  [QFN40-6X6]  14.02,90.79 0 top
U$2  MOTORCON  [GEN3CON]  2.91,112.38 270 bottom
U$3  MCP9700SMD  [SOT23-3]  42.7,103.41 0 bottom
U$4  MOTORCON  [GEN3CON]  39.42,112.38 270 bottom
U$5  MCP9700SMD  [SOT23-3]  6.18,103.41 0 bottom
U$6  DRV8307  [QFN40-6X6]  50.53,90.79 0 top
U$7  MCP9700SMD  [SOT23-3]  78.57,103.41 0 bottom
U$8  MOTORCON  [GEN3CON]  75.3,112.38 270 bottom
U$9  DRV8307  [QFN40-6X6]  86.41,90.79 0 top
U$10  MCP9700SMD  [SOT23-3]  6.18,39.59 0 bottom
U$11  MOTORCON  [GEN3CON]  2.91,48.57 270 bottom
U$12  DRV8307  [QFN40-6X6]  14.02,26.98 0 top
U$13  MCP9700SMD  [SOT23-3]  42.7,39.59 0 bottom
U$14  MOTORCON  [GEN3CON]  39.42,48.57 270 bottom
U$15  DRV8307  [QFN40-6X6]  50.53,26.98 0 top
U$16  MCP9700SMD  [SOT23-3]  78.57,39.59 0 bottom
U$17  MOTORCON  [GEN3CON]  75.3,48.57 270 bottom
U$18  DRV8307  [QFN40-6X6]  86.41,26.98 0 top
U$19  MCP9700SMD  [SOT23-3]  114.45,103.41 0 bottom
U$20  MOTORCON  [GEN3CON]  111.17,112.38 270 bottom
U$21  DRV8307  [QFN40-6X6]  122.28,90.79 0 top
U$22  MCP9700SMD  [SOT23-3]  114.45,39.59 0 bottom
U$23  MOTORCON  [GEN3CON]  111.17,48.57 270 bottom
U$24  DRV8307  [QFN40-6X6]  122.28,26.98 0 top

## Library data of the parts
C1 C4 C6 C8-C10 C12 C13 C15 C20-C22 C25 C26 C29 C35-C37 C41 C42 C47 C52-C54 C57 C58 C61 C66-C68 C71 C72 C75 C80-C82 C85 C86 C89 C94-C96 C99 C100 C103 C108-C110 R1-R4 R15 R18-R20 R29-R33 R38 R43 R46-R48 R57-R61 R67 R72 R75-R77 R88-R92 R97-R99 R101 R103 R109 R112-R115 R124-R128 R133 R138 R141-R143 R152-R156 R161 R166 R169-R171 R180-R184 R189 R194 R197-R199 R208-R212 R217 R222 = SparkFun-Passives
C2 C7 C16 C17 C30 C31 C48 C49 C62 C63 C76 C77 C90 C91 C104 C105 = gen3; PROD_ID: CAP-10547
C3 C5 C11 C14 C18 C19 C23 C24 C27 C28 C32-C34 C38-C40 C43-C46 C50 C51 C55 C56 C59 C60 C64 C65 C69 C70 C73 C74 C78 C79 C83 C84 C87 C88 C92 C93 C97 C98 C101 C102 C106 C107 C111 C112 = SparkFun-Capacitors
D1-D8 GEN_4_REV_A M1O1-M1O24 U$2 U$4 U$8 U$11 U$14 U$17 U$20 U$23 = gen3
FRAME7 = SparkFun-Aesthetics
IC1 IC3 IC5 IC7 IC9 IC11 IC13 IC15 = atmel; OC_FARNELL: unknown; OC_NEWARK: unknown
IC2 IC4 IC6 IC8 IC10 IC12 IC14 IC16 = linear-technology; MPN: LT1129CST-5#PBF; OC_FARNELL: 1663375; OC_NEWARK: 57M2069
JP1-JP24 = SparkFun-Connectors
LED1-LED32 = SparkFun-LED
Q1-Q48 = rfc
R5-R14 R16 R17 R21-R28 R34-R37 R39-R42 R44 R45 R49-R56 R62-R66 R68-R71 R73 R74 R78-R87 R93-R96 R100 R102 R104-R108 R110 R111 R116-R123 R129-R132 R134-R137 R139 R140 R144-R151 R157-R160 R162-R165 R167 R168 R172-R179 R185-R188 R190-R193 R195 R196 R200-R207 R213-R216 R218-R221 R223 R224 = SparkFun-Resistors
S1-S8 = SparkFun-Retired; PROD_ID: SWCH-08247
U$1 U$6 U$9 U$12 U$15 U$18 U$21 U$24 = texas2
U$3 U$5 U$7 U$10 U$13 U$16 U$19 U$22 = SparkFun-Sensors; PROD_ID: IC-08917

## Nets
3.3V: C5.2 C12.2 C45.1 C46.1 IC1.9 IC1.19 IC1.31 IC2.3 JP1.2 JP4.1 R7.1 R9.1 R17.2 R63.1 R97.2 R105.2 R106.2 R107.2 R113.2 U$1.24 U$2.1 U$5.1
3.3V1: C18.1 C19.1 C21.2 C24.2 IC3.9 IC3.19 IC3.31 IC4.3 JP2.2 JP6.1 R29.2 R34.1 R35.2 R36.2 R37.2 R38.2 R40.1 R41.1 R45.2 U$3.1 U$4.1 U$6.24
3.3V2: C32.1 C34.1 C36.2 C39.2 IC5.9 IC5.19 IC5.31 IC6.3 JP7.2 JP9.1 R57.2 R62.1 R64.2 R65.2 R66.2 R67.2 R69.1 R70.1 R74.2 U$7.1 U$8.1 U$9.24
3.3V3: C50.1 C51.1 C53.2 C56.2 IC7.9 IC7.19 IC7.31 IC8.3 JP10.2 JP12.1 R88.2 R93.1 R94.2 R95.2 R96.2 R98.2 R102.1 R104.1 R111.2 U$10.1 U$11.1 U$12.24
3.3V4: C64.1 C65.1 C67.2 C70.2 IC9.9 IC9.19 IC9.31 IC10.3 JP13.2 JP15.1 R124.2 R129.1 R130.2 R131.2 R132.2 R133.2 R135.1 R136.1 R140.2 U$13.1 U$14.1 U$15.24
3.3V5: C78.1 C79.1 C81.2 C84.2 IC11.9 IC11.19 IC11.31 IC12.3 JP16.2 JP18.1 R152.2 R157.1 R158.2 R159.2 R160.2 R161.2 R163.1 R164.1 R168.2 U$16.1 U$17.1 U$18.24
3.3V6: C92.1 C93.1 C95.2 C98.2 IC13.9 IC13.19 IC13.31 IC14.3 JP19.2 JP21.1 R180.2 R185.1 R186.2 R187.2 R188.2 R189.2 R191.1 R192.1 R196.2 U$19.1 U$20.1 U$21.24
3.3V7: C106.1 C107.1 C109.2 C112.2 IC15.9 IC15.19 IC15.31 IC16.3 JP22.2 JP24.1 R208.2 R213.1 R214.2 R215.2 R216.2 R217.2 R219.1 R220.1 R224.2 U$22.1 U$23.1 U$24.24
12V: C1.1 C2.+ C3.2 C7.+ C8.1 C13.2 D5.C IC2.1 JP3.1 JP3.2 JP3.3 JP3.4 Q1.DRAIN Q2.DRAIN Q6.DRAIN U$1.27
12V1: C15.1 C16.+ C17.+ C20.1 C22.2 C23.2 D1.C IC4.1 JP5.1 JP5.2 JP5.3 JP5.4 Q7.DRAIN Q8.DRAIN Q9.DRAIN U$6.27
12V2: C29.1 C30.+ C31.+ C35.1 C37.2 C38.2 D2.C IC6.1 JP8.1 JP8.2 JP8.3 JP8.4 Q13.DRAIN Q14.DRAIN Q15.DRAIN U$9.27
12V3: C47.1 C48.+ C49.+ C52.1 C54.2 C55.2 D3.C IC8.1 JP11.1 JP11.2 JP11.3 JP11.4 Q19.DRAIN Q20.DRAIN Q21.DRAIN U$12.27
12V4: C61.1 C62.+ C63.+ C66.1 C68.2 C69.2 D4.C IC10.1 JP14.1 JP14.2 JP14.3 JP14.4 Q25.DRAIN Q26.DRAIN Q27.DRAIN U$15.27
12V5: C75.1 C76.+ C77.+ C80.1 C82.2 C83.2 D6.C IC12.1 JP17.1 JP17.2 JP17.3 JP17.4 Q31.DRAIN Q32.DRAIN Q33.DRAIN U$18.27
12V6: C89.1 C90.+ C91.+ C94.1 C96.2 C97.2 D7.C IC14.1 JP20.1 JP20.2 JP20.3 JP20.4 Q37.DRAIN Q38.DRAIN Q39.DRAIN U$21.27
12V7: C103.1 C104.+ C105.+ C108.1 C110.2 C111.2 D8.C IC16.1 JP23.1 JP23.2 JP23.3 JP23.4 Q43.DRAIN Q44.DRAIN Q45.DRAIN U$24.27
12VGND: C2.- C7.- C8.2 D5.A JP3.37 JP3.38 JP3.39 JP3.40 R5.2
12VGND1: C15.2 C16.- C17.- D1.A JP5.37 JP5.38 JP5.39 JP5.40 R39.2
12VGND2: C29.2 C30.- C31.- D2.A JP8.37 JP8.38 JP8.39 JP8.40 R68.2
12VGND3: C47.2 C48.- C49.- D3.A JP11.37 JP11.38 JP11.39 JP11.40 R100.2
12VGND4: C61.2 C62.- C63.- D4.A JP14.37 JP14.38 JP14.39 JP14.40 R134.2
12VGND5: C75.2 C76.- C77.- D6.A JP17.37 JP17.38 JP17.39 JP17.40 R162.2
12VGND6: C89.2 C90.- C91.- D7.A JP20.37 JP20.38 JP20.39 JP20.40 R190.2
12VGND7: C103.2 C104.- C105.- D8.A JP23.37 JP23.38 JP23.39 JP23.40 R218.2
AVCC: C40.2 IC1.39 R97.1
AVCC1: C14.2 IC3.39 R29.1
AVCC2: C28.2 IC5.39 R57.1
AVCC3: C44.2 IC7.39 R88.1
AVCC4: C60.2 IC9.39 R124.1
AVCC5: C74.2 IC11.39 R152.1
AVCC6: C88.2 IC13.39 R180.1
AVCC7: C102.2 IC15.39 R208.1
BREN: IC1.24 R79.2
BREN1: IC3.24 R28.2
BREN2: IC5.24 R56.2
BREN3: IC7.24 R87.2
BREN4: IC9.24 R123.2
BREN5: IC11.24 R151.2
BREN6: IC13.24 R179.2
BREN7: IC15.24 R207.2
DIR: IC1.25 R78.2
DIR1: IC3.25 R27.2
DIR2: IC5.25 R55.2
DIR3: IC7.25 R86.2
DIR4: IC9.25 R122.2
DIR5: IC11.25 R150.2
DIR6: IC13.25 R178.2
DIR7: IC15.25 R206.2
ENABLE: IC1.26 R11.2
ENABLE1: IC3.26 R42.2
ENABLE2: IC5.26 R71.2
ENABLE3: IC7.26 R108.2
ENABLE4: IC9.26 R137.2
ENABLE5: IC11.26 R165.2
ENABLE6: IC13.26 R193.2
ENABLE7: IC15.26 R221.2
FAULT1: IC1.20
FAULT2: IC3.20
FAULT3: IC5.20
FAULT4: IC7.20
FAULT5: IC9.20
FAULT6: IC11.20
FAULT7: IC13.20
FAULT8: IC15.20
GLED1: IC1.10 R1.2
GLED2: IC1.11 R99.2
GLED3: IC1.12 R101.2
GLED4: IC1.13 R103.2
GLED5: IC3.10 R30.2
GLED6: IC3.11 R31.2
GLED7: IC3.12 R32.2
GLED8: IC3.13 R33.2
GLED9: IC5.10 R58.2
GLED10: IC5.11 R59.2
GLED11: IC5.12 R60.2
GLED12: IC5.13 R61.2
GLED13: IC7.10 R89.2
GLED14: IC7.11 R90.2
GLED15: IC7.12 R91.2
GLED16: IC7.13 R92.2
GLED17: IC9.10 R125.2
GLED18: IC9.11 R126.2
GLED19: IC9.12 R127.2
GLED20: IC9.13 R128.2
GLED21: IC11.10 R153.2
GLED22: IC11.11 R154.2
GLED23: IC11.12 R155.2
GLED24: IC11.13 R156.2
GLED25: IC13.10 R181.2
GLED26: IC13.11 R182.2
GLED27: IC13.12 R183.2
GLED28: IC13.13 R184.2
GLED29: IC15.10 R209.2
GLED30: IC15.11 R210.2
GLED31: IC15.12 R211.2
GLED32: IC15.13 R212.2
GND: C3.1 C4.1 C5.1 C12.1 C13.1 C33.1 C40.1 C45.2 C46.2 IC1.8 IC1.18 IC1.30 IC1.38 IC2.2 IC2.4 JP1.4 JP1.6 JP1.8 JP1.10 JP3.34 JP3.36 JP4.3 LED9.C LED11.C LED13.C LED15.C R16.1 S2.4 U$1.26 U$1.P$3 U$2.5 U$5.3
GND1: C9.1 C11.1 C14.1 C18.2 C19.2 C21.1 C22.1 C23.1 C24.1 IC3.8 IC3.18 IC3.30 IC3.38 IC4.2 IC4.4 JP2.4 JP2.6 JP2.8 JP2.10 JP5.34 JP5.36 JP6.3 LED1.C LED2.C LED3.C LED4.C R44.1 S1.4 U$3.3 U$4.5 U$6.26 U$6.P$3
GND2: C25.1 C27.1 C28.1 C32.2 C34.2 C36.1 C37.1 C38.1 C39.1 IC5.8 IC5.18 IC5.30 IC5.38 IC6.2 IC6.4 JP7.4 JP7.6 JP7.8 JP7.10 JP8.34 JP8.36 JP9.3 LED5.C LED6.C LED7.C LED8.C R73.1 S3.4 U$7.3 U$8.5 U$9.26 U$9.P$3
GND3: C41.1 C43.1 C44.1 C50.2 C51.2 C53.1 C54.1 C55.1 C56.1 IC7.8 IC7.18 IC7.30 IC7.38 IC8.2 IC8.4 JP10.4 JP10.6 JP10.8 JP10.10 JP11.34 JP11.36 JP12.3 LED10.C LED12.C LED14.C LED16.C R110.1 S4.4 U$10.3 U$11.5 U$12.26 U$12.P$3
GND4: C57.1 C59.1 C60.1 C64.2 C65.2 C67.1 C68.1 C69.1 C70.1 IC9.8 IC9.18 IC9.30 IC9.38 IC10.2 IC10.4 JP13.4 JP13.6 JP13.8 JP13.10 JP14.34 JP14.36 JP15.3 LED17.C LED18.C LED19.C LED20.C R139.1 S5.4 U$13.3 U$14.5 U$15.26 U$15.P$3
GND5: C71.1 C73.1 C74.1 C78.2 C79.2 C81.1 C82.1 C83.1 C84.1 IC11.8 IC11.18 IC11.30 IC11.38 IC12.2 IC12.4 JP16.4 JP16.6 JP16.8 JP16.10 JP17.34 JP17.36 JP18.3 LED21.C LED22.C LED23.C LED24.C R167.1 S6.4 U$16.3 U$17.5 U$18.26 U$18.P$3
GND6: C85.1 C87.1 C88.1 C92.2 C93.2 C95.1 C96.1 C97.1 C98.1 IC13.8 IC13.18 IC13.30 IC13.38 IC14.2 IC14.4 JP19.4 JP19.6 JP19.8 JP19.10 JP20.34 JP20.36 JP21.3 LED25.C LED26.C LED27.C LED28.C R195.1 S7.4 U$19.3 U$20.5 U$21.26 U$21.P$3
GND7: C99.1 C101.1 C102.1 C106.2 C107.2 C109.1 C110.1 C111.1 C112.1 IC15.8 IC15.18 IC15.30 IC15.38 IC16.2 IC16.4 JP22.4 JP22.6 JP22.8 JP22.10 JP23.34 JP23.36 JP24.3 LED29.C LED30.C LED31.C LED32.C R223.1 S8.4 U$22.3 U$23.5 U$24.26 U$24.P$3
M1H1: R106.1 U$1.5 U$2.3
M1H2: R107.1 U$1.3 U$2.4
M1H3: R105.1 U$1.1 U$2.2
M1H4: R35.1 U$4.2 U$6.1
M1H5: R37.1 U$4.4 U$6.3
M1H6: R36.1 U$4.3 U$6.5
M1H7: R64.1 U$8.2 U$9.1
M1H8: R66.1 U$8.4 U$9.3
M1H9: R65.1 U$8.3 U$9.5
M1H10: R94.1 U$11.2 U$12.1
M1H11: R96.1 U$11.4 U$12.3
M1H12: R95.1 U$11.3 U$12.5
M1H13: R130.1 U$14.2 U$15.1
M1H14: R132.1 U$14.4 U$15.3
M1H15: R131.1 U$14.3 U$15.5
M1H16: R158.1 U$17.2 U$18.1
M1H17: R160.1 U$17.4 U$18.3
M1H18: R159.1 U$17.3 U$18.5
M1H19: R186.1 U$20.2 U$21.1
M1H20: R188.1 U$20.4 U$21.3
M1H21: R187.1 U$20.3 U$21.5
M1H22: R214.1 U$23.2 U$24.1
M1H23: R216.1 U$23.4 U$24.3
M1H24: R215.1 U$23.3 U$24.5
M1O1: M1O1.P$1 Q3.DRAIN Q6.SOURCE U$1.39 U$2.10 U$2.11
M1O2: M1O2.P$1 Q1.SOURCE Q4.DRAIN U$1.36 U$2.8 U$2.9
M1O3: M1O3.P$1 Q2.SOURCE Q5.DRAIN U$1.33 U$2.6 U$2.7
M1O4: M1O4.P$1 Q7.SOURCE Q10.DRAIN U$4.10 U$4.11 U$6.39
M1O5: M1O5.P$1 Q8.SOURCE Q11.DRAIN U$4.8 U$4.9 U$6.36
M1O6: M1O6.P$1 Q9.SOURCE Q12.DRAIN U$4.6 U$4.7 U$6.33
M1O7: M1O7.P$1 Q13.SOURCE Q16.DRAIN U$8.10 U$8.11 U$9.39
M1O8: M1O8.P$1 Q14.SOURCE Q17.DRAIN U$8.8 U$8.9 U$9.36
M1O9: M1O9.P$1 Q15.SOURCE Q18.DRAIN U$8.6 U$8.7 U$9.33
M1O10: M1O10.P$1 Q19.SOURCE Q22.DRAIN U$11.10 U$11.11 U$12.39
M1O11: M1O11.P$1 Q20.SOURCE Q23.DRAIN U$11.8 U$11.9 U$12.36
M1O12: M1O12.P$1 Q21.SOURCE Q24.DRAIN U$11.6 U$11.7 U$12.33
M1O13: M1O13.P$1 Q25.SOURCE Q28.DRAIN U$14.10 U$14.11 U$15.39
M1O14: M1O14.P$1 Q26.SOURCE Q29.DRAIN U$14.8 U$14.9 U$15.36
M1O15: M1O15.P$1 Q27.SOURCE Q30.DRAIN U$14.6 U$14.7 U$15.33
M1O16: M1O16.P$1 Q31.SOURCE Q34.DRAIN U$17.10 U$17.11 U$18.39
M1O17: M1O17.P$1 Q32.SOURCE Q35.DRAIN U$17.8 U$17.9 U$18.36
M1O18: M1O18.P$1 Q33.SOURCE Q36.DRAIN U$17.6 U$17.7 U$18.33
M1O19: M1O19.P$1 Q37.SOURCE Q40.DRAIN U$20.10 U$20.11 U$21.39
M1O20: M1O20.P$1 Q38.SOURCE Q41.DRAIN U$20.8 U$20.9 U$21.36
M1O21: M1O21.P$1 Q39.SOURCE Q42.DRAIN U$20.6 U$20.7 U$21.33
M1O22: M1O22.P$1 Q43.SOURCE Q46.DRAIN U$23.10 U$23.11 U$24.39
M1O23: M1O23.P$1 Q44.SOURCE Q47.DRAIN U$23.8 U$23.9 U$24.36
M1O24: M1O24.P$1 Q45.SOURCE Q48.DRAIN U$23.6 U$23.7 U$24.33
M1QA: IC1.42 JP4.2
M1QA1: IC3.42 JP6.2
M1QA2: IC5.42 JP9.2
M1QA3: IC7.42 JP12.2
M1QA4: IC9.42 JP15.2
M1QA5: IC11.42 JP18.2
M1QA6: IC13.42 JP21.2
M1QA7: IC15.42 JP24.2
M1QB: IC1.41 JP4.4
M1QB1: IC3.41 JP6.4
M1QB2: IC5.41 JP9.4
M1QB3: IC7.41 JP12.4
M1QB4: IC9.41 JP15.4
M1QB5: IC11.41 JP18.4
M1QB6: IC13.41 JP21.4
M1QB7: IC15.41 JP24.4
MISO: IC1.16 R3.1
MISO1: IC3.16 R19.1
MISO2: IC5.16 R47.1
MISO3: IC7.16 R76.1
MISO4: IC9.16 R114.1
MISO5: IC11.16 R142.1
MISO6: IC13.16 R170.1
MISO7: IC15.16 R198.1
MOSI: IC1.15 JP1.1 R2.1
MOSI1: IC3.15 JP2.1 R18.1
MOSI2: IC5.15 JP7.1 R46.1
MOSI3: IC7.15 JP10.1 R75.1
MOSI4: IC9.15 JP13.1 R112.1
MOSI5: IC11.15 JP16.1 R141.1
MOSI6: IC13.15 JP19.1 R169.1
MOSI7: IC15.15 JP22.1 R197.1
N$1: LED9.A R1.1
N$2: C6.2 U$1.29
N$3: JP3.31 R3.2
N$4: JP3.33 R4.2
N$5: JP5.31 R19.2
N$6: Q6.GATE R6.2
N$7: Q1.GATE R8.2
N$8: C33.2 IC1.40
N$9: C6.1 U$1.30
N$10: Q2.GATE R10.2
N$11: Q3.GATE R12.2
N$12: C1.2 U$1.28
N$13: Q4.GATE R13.2
N$14: Q5.GATE R14.2
N$15: C4.2 U$1.25
N$16: R6.1 U$1.40
N$17: R14.1 U$1.32
N$18: R13.1 U$1.35
N$19: R12.1 U$1.38
N$20: R8.1 U$1.37
N$21: R10.1 U$1.34
N$22: R16.2 R17.1 U$1.2 U$1.4 U$1.6
N$23: R79.1 U$1.20
N$24: R7.2 U$1.18
N$25: JP5.33 R20.2
N$27: Q7.GATE R21.2
N$28: R63.2 U$1.17
N$30: Q8.GATE R22.2
N$31: R9.2 U$1.16
N$32: R11.1 U$1.22
N$33: Q9.GATE R23.2
N$34: JP3.35 R15.2
N$37: Q10.GATE R24.2
N$38: Q11.GATE R25.2
N$39: Q12.GATE R26.2
N$40: R21.1 U$6.40
N$41: R26.1 U$6.32
N$42: R25.1 U$6.35
N$43: R24.1 U$6.38
N$44: R22.1 U$6.37
N$45: JP3.29 R2.2
N$46: R23.1 U$6.34
N$47: R27.1 U$6.21
N$48: LED1.A R30.1
N$49: LED2.A R31.1
N$50: LED3.A R32.1
N$51: LED4.A R33.1
N$52: JP5.29 R18.2
N$53: C11.2 IC3.40
N$54: C10.1 U$6.30
N$55: C20.2 U$6.28
N$56: C9.2 U$6.25
N$57: R28.1 U$6.20
N$58: R40.2 U$6.18
N$59: R34.2 U$6.17
N$60: R41.2 U$6.16
N$61: R42.1 U$6.22
N$62: JP5.35 R43.2
N$63: R44.2 R45.1 U$6.2 U$6.4 U$6.6
N$64: C10.2 U$6.29
N$65: JP8.31 R47.2
N$66: JP8.33 R48.2
N$67: Q13.GATE R49.2
N$68: Q14.GATE R50.2
N$69: Q15.GATE R51.2
N$70: Q16.GATE R52.2
N$71: Q17.GATE R53.2
N$72: Q18.GATE R54.2
N$73: R49.1 U$9.40
N$74: R54.1 U$9.32
N$75: R53.1 U$9.35
N$76: R52.1 U$9.38
N$77: R50.1 U$9.37
N$78: R51.1 U$9.34
N$79: R55.1 U$9.21
N$80: LED5.A R58.1
N$81: LED6.A R59.1
N$82: LED7.A R60.1
N$83: LED8.A R61.1
N$84: JP8.29 R46.2
N$85: C27.2 IC5.40
N$86: C26.1 U$9.30
N$87: C35.2 U$9.28
N$88: C25.2 U$9.25
N$89: R56.1 U$9.20
N$90: R69.2 U$9.18
N$91: R62.2 U$9.17
N$92: R70.2 U$9.16
N$93: R71.1 U$9.22
N$94: JP8.35 R72.2
N$95: R73.2 R74.1 U$9.2 U$9.4 U$9.6
N$96: C26.2 U$9.29
N$97: JP11.31 R76.2
N$98: R78.1 U$1.21
N$99: JP11.33 R77.2
N$101: Q19.GATE R80.2
N$102: Q20.GATE R81.2
N$103: Q21.GATE R82.2
N$104: Q22.GATE R83.2
N$105: Q23.GATE R84.2
N$106: Q24.GATE R85.2
N$107: R80.1 U$12.40
N$108: R85.1 U$12.32
N$109: R84.1 U$12.35
N$110: R83.1 U$12.38
N$111: R81.1 U$12.37
N$112: R82.1 U$12.34
N$113: R86.1 U$12.21
N$114: LED11.A R99.1
N$115: LED10.A R89.1
N$116: LED12.A R90.1
N$117: LED13.A R101.1
N$118: LED14.A R91.1
N$119: LED15.A R103.1
N$120: LED16.A R92.1
N$121: JP11.29 R75.2
N$122: C43.2 IC7.40
N$123: C42.1 U$12.30
N$126: C52.2 U$12.28
N$127: C41.2 U$12.25
N$128: R87.1 U$12.20
N$129: R102.2 U$12.18
N$130: R93.2 U$12.17
N$131: R104.2 U$12.16
N$132: R108.1 U$12.22
N$133: JP11.35 R109.2
N$134: R110.2 R111.1 U$12.2 U$12.4 U$12.6
N$135: C42.2 U$12.29
N$136: JP14.31 R114.2
N$137: JP14.33 R115.2
N$138: Q25.GATE R116.2
N$139: Q26.GATE R117.2
N$140: Q27.GATE R118.2
N$141: Q28.GATE R119.2
N$142: Q29.GATE R120.2
N$143: Q30.GATE R121.2
N$144: R116.1 U$15.40
N$145: R121.1 U$15.32
N$146: R120.1 U$15.35
N$147: R119.1 U$15.38
N$148: R117.1 U$15.37
N$149: R118.1 U$15.34
N$150: R122.1 U$15.21
N$151: LED17.A R125.1
N$152: LED18.A R126.1
N$153: LED19.A R127.1
N$154: LED20.A R128.1
N$155: JP14.29 R112.2
N$156: C59.2 IC9.40
N$157: C58.1 U$15.30
N$158: C66.2 U$15.28
N$159: C57.2 U$15.25
N$160: R123.1 U$15.20
N$161: R135.2 U$15.18
N$162: R129.2 U$15.17
N$163: R136.2 U$15.16
N$164: R137.1 U$15.22
N$165: JP14.35 R138.2
N$166: R139.2 R140.1 U$15.2 U$15.4 U$15.6
N$167: C58.2 U$15.29
N$168: JP17.31 R142.2
N$169: JP17.33 R143.2
N$170: Q31.GATE R144.2
N$171: Q32.GATE R145.2
N$172: Q33.GATE R146.2
N$173: Q34.GATE R147.2
N$174: Q35.GATE R148.2
N$175: Q36.GATE R149.2
N$176: R144.1 U$18.40
N$177: R149.1 U$18.32
N$178: R148.1 U$18.35
N$179: R147.1 U$18.38
N$180: R145.1 U$18.37
N$181: R146.1 U$18.34
N$182: R150.1 U$18.21
N$183: LED21.A R153.1
N$184: LED22.A R154.1
N$185: LED23.A R155.1
N$186: LED24.A R156.1
N$187: JP17.29 R141.2
N$188: C73.2 IC11.40
N$189: C72.1 U$18.30
N$190: C80.2 U$18.28
N$191: C71.2 U$18.25
N$192: R151.1 U$18.20
N$193: R163.2 U$18.18
N$194: R157.2 U$18.17
N$195: R164.2 U$18.16
N$196: R165.1 U$18.22
N$197: JP17.35 R166.2
N$198: R167.2 R168.1 U$18.2 U$18.4 U$18.6
N$199: C72.2 U$18.29
N$200: JP20.31 R170.2
N$201: JP20.33 R171.2
N$202: Q37.GATE R172.2
N$203: Q38.GATE R173.2
N$204: Q39.GATE R174.2
N$205: Q40.GATE R175.2
N$206: Q41.GATE R176.2
N$207: Q42.GATE R177.2
N$208: R172.1 U$21.40
N$209: R177.1 U$21.32
N$210: R176.1 U$21.35
N$211: R175.1 U$21.38
N$212: R173.1 U$21.37
N$213: R174.1 U$21.34
N$214: R178.1 U$21.21
N$215: LED25.A R181.1
N$216: LED26.A R182.1
N$217: LED27.A R183.1
N$218: LED28.A R184.1
N$219: JP20.29 R169.2
N$220: C87.2 IC13.40
N$221: C86.1 U$21.30
N$222: C94.2 U$21.28
N$223: C85.2 U$21.25
N$224: R179.1 U$21.20
N$225: R191.2 U$21.18
N$226: R185.2 U$21.17
N$227: R192.2 U$21.16
N$228: R193.1 U$21.22
N$229: JP20.35 R194.2
N$230: R195.2 R196.1 U$21.2 U$21.4 U$21.6
N$231: C86.2 U$21.29
N$232: JP23.31 R198.2
N$233: JP23.33 R199.2
N$234: Q43.GATE R200.2
N$235: Q44.GATE R201.2
N$236: Q45.GATE R202.2
N$237: Q46.GATE R203.2
N$238: Q47.GATE R204.2
N$239: Q48.GATE R205.2
N$240: R200.1 U$24.40
N$241: R205.1 U$24.32
N$242: R204.1 U$24.35
N$243: R203.1 U$24.38
N$244: R201.1 U$24.37
N$245: R202.1 U$24.34
N$246: R206.1 U$24.21
N$247: LED29.A R209.1
N$248: LED30.A R210.1
N$249: LED31.A R211.1
N$250: LED32.A R212.1
N$251: JP23.29 R197.2
N$252: C101.2 IC15.40
N$253: C100.1 U$24.30
N$254: C108.2 U$24.28
N$255: C99.2 U$24.25
N$256: R207.1 U$24.20
N$257: R219.2 U$24.18
N$258: R213.2 U$24.17
N$259: R220.2 U$24.16
N$260: R221.1 U$24.22
N$261: JP23.35 R222.2
N$262: R223.2 R224.1 U$24.2 U$24.4 U$24.6
N$263: C100.2 U$24.29
O1: Q3.SOURCE Q4.SOURCE Q5.SOURCE R5.1 U$1.31
O2: Q10.SOURCE Q11.SOURCE Q12.SOURCE R39.1 U$6.31
O3: Q16.SOURCE Q17.SOURCE Q18.SOURCE R68.1 U$9.31
O4: Q22.SOURCE Q23.SOURCE Q24.SOURCE R100.1 U$12.31
O5: Q28.SOURCE Q29.SOURCE Q30.SOURCE R134.1 U$15.31
O6: Q34.SOURCE Q35.SOURCE Q36.SOURCE R162.1 U$18.31
O7: Q40.SOURCE Q41.SOURCE Q42.SOURCE R190.1 U$21.31
O8: Q46.SOURCE Q47.SOURCE Q48.SOURCE R218.1 U$24.31
PWM1: IC1.23 U$1.19
PWM2: IC3.23 U$6.19
PWM3: IC5.23 U$9.19
PWM4: IC7.23 U$12.19
PWM5: IC9.23 U$15.19
PWM6: IC11.23 U$18.19
PWM7: IC13.23 U$21.19
PWM8: IC15.23 U$24.19
RESET: IC1.35 JP1.5 R113.1 S2.2
RESET1: IC3.35 JP2.5 R38.1 S1.2
RESET2: IC5.35 JP7.5 R67.1 S3.2
RESET3: IC7.35 JP10.5 R98.1 S4.2
RESET4: IC9.35 JP13.5 R133.1 S5.2
RESET5: IC11.35 JP16.5 R161.1 S6.2
RESET6: IC13.35 JP19.5 R189.1 S7.2
RESET7: IC15.35 JP22.5 R217.1 S8.2
SCK: IC1.17 JP1.7 R4.1
SCK1: IC3.17 JP2.7 R20.1
SCK2: IC5.17 JP7.7 R48.1
SCK3: IC7.17 JP10.7 R77.1
SCK4: IC9.17 JP13.7 R115.1
SCK5: IC11.17 JP16.7 R143.1
SCK6: IC13.17 JP19.7 R171.1
SCK7: IC15.17 JP22.7 R199.1
SENSE1: IC1.21
SENSE2: IC3.21
SENSE3: IC5.21
SENSE4: IC7.21
SENSE5: IC9.21
SENSE6: IC11.21
SENSE7: IC13.21
SENSE8: IC15.21
SS_M: IC1.14 R15.1
SS_M1: IC3.14 R43.1
SS_M2: IC5.14 R72.1
SS_M3: IC7.14 R109.1
SS_M4: IC9.14 R138.1
SS_M5: IC11.14 R166.1
SS_M6: IC13.14 R194.1
SS_M7: IC15.14 R222.1
TSENSE1: IC1.22 U$5.2
TSENSE2: IC3.22 U$3.2
TSENSE3: IC5.22 U$7.2
TSENSE4: IC7.22 U$10.2
TSENSE5: IC9.22 U$13.2
TSENSE6: IC11.22 U$16.2
TSENSE7: IC13.22 U$19.2
TSENSE8: IC15.22 U$22.2

## Tracks (layer width: path | path; a pad name or v marks a point on that pad's centre or on a via)
3.3V  (via drill 0.3)
  Top 0.254: 11.83,70.14 19.26,70.16 19.73,70.16 19.73,67.94 19.26,67.94 19.26,66.74 IC1.19 19.27,64.77 19.41,64.44 23.38,64.44 v23.38,64.76 23.38,67.62 22.75,67.62 22.27,68.09 22.27,70.16 21.95,70.48 21.95,74.6 22.11,74.76 23.45,74.76 IC1.31 23.49,74.76 24.5,74.76 24.65,74.92 24.65,77.3 21.8,80.16 19.89,80.16 19.84,80.21 R97.2 19.89,81.91 19.89,82.65 19.1,83.44 | U$1.24 17.78,90.05 v18.14,89.68 18.14,88.89 18.38,88.57 18.38,87.46 18.78,87.14 18.78,84.92 19.1,84.6 19.1,83.44 | v10.37,84.29 12.36,84.29 R9.1 R63.1 R7.1 15.63,83.47 16.24,82.86 18.52,82.86 19.1,83.44 | v7.83,94.76 R17.2 | C5.2 4.76,89.79 4.65,89.68 4.65,87.78 5.13,87.3 5.13,84.92 v7.99,82.22 | v9.73,108.97 10.21,109.05 v11,109.69 | v9.57,101.43 8.88,101.43 v7.13,99.69 | JP1.2 32.91,79.89 32.91,70.48 32.11,69.68 31.32,69.68 30.84,69.21 30.84,66.03 29.26,64.44 25.45,64.44 v25.21,64.81 25.11,65.09 24.81,65.71 24.81,67.62 24.98,67.78 R113.2 | v23.86,93.49 22.86,93.49 C12.2
  Top 0.305: R17.2 6.99,93.44 IC2.3
  Top 0.406: IC1.9 11.83,70.14 9.5,70.14 | 9.5,70.14 C45.1 | 9.5,70.14 9.5,71.45 C46.1
  Top 0.61: C5.2 6.08,92.87 IC2.3
  Bottom 0.254: v10.37,84.29 10.37,81.43 9.89,80.95 JP4.1 7.99,81.03 v7.99,82.22 | R107.2 R105.2 10.21,110.48 v11,109.69 | U$5.1 v7.13,99.69 7.13,95.78 v7.83,94.76 | U$2.1 4.9,107.05 5.6,106.35 8.46,106.35 9.1,106.99 | 9.1,106.99 9.41,107.31 9.41,107.83 R106.2 9.52,108.81 v9.73,108.97 | 9.1,106.99 9.73,106.99 10.37,106.35 10.37,105.72 9.57,104.92 v9.57,101.43 | v23.38,64.76 23.7,64.44 25,64.44 v25.21,64.81 | v18.14,89.68 22.59,89.68 23.07,90.16 23.07,92.7 v23.86,93.49
3.3V1  (via drill 0.3)
  Top 0.254: 48.34,70.14 55.77,70.16 56.24,70.16 56.24,67.94 55.77,67.94 55.77,66.74 IC3.19 55.78,64.77 55.93,64.44 59.9,64.44 v59.9,64.76 59.9,67.62 59.26,67.62 58.78,68.09 58.78,70.16 58.47,70.48 58.47,74.6 58.63,74.76 59.96,74.76 IC3.31 60,74.76 61.01,74.76 61.17,74.92 61.17,77.3 58.31,80.16 56.4,80.16 56.35,80.21 R29.2 56.4,81.91 56.4,82.65 55.61,83.44 | U$6.24 54.3,90.05 v54.66,89.68 54.66,88.89 54.9,88.57 54.9,87.46 55.29,87.14 55.29,84.92 55.61,84.6 55.61,83.44 | v46.88,84.29 48.87,84.29 R41.1 R34.1 R40.1 52.14,83.47 52.75,82.86 55.03,82.86 55.61,83.44 | v44.34,94.76 R45.2 | C24.2 41.27,89.79 41.16,89.68 41.16,87.78 41.64,87.3 41.64,84.92 v44.5,82.22 | v46.24,108.97 46.72,109.05 v47.51,109.69 | v46.09,101.43 45.39,101.43 v43.65,99.69 | JP2.2 69.42,79.89 69.42,70.48 68.63,69.68 67.83,69.68 67.36,69.21 67.36,66.03 65.77,64.44 61.96,64.44 v61.72,64.81 61.62,65.09 61.33,65.71 61.33,67.62 61.49,67.78 R38.2 | v60.37,93.49 59.37,93.49 C21.2
  Top 0.305: R45.2 43.51,93.44 IC4.3
  Top 0.406: IC3.9 48.34,70.14 46.01,70.14 | 46.01,70.14 C18.1 | 46.01,70.14 46.01,71.45 C19.1
  Top 0.61: C24.2 42.59,92.87 IC4.3
  Bottom 0.254: v46.88,84.29 46.88,81.43 46.4,80.95 JP6.1 44.5,81.03 v44.5,82.22 | R37.2 R35.2 46.72,110.48 v47.51,109.69 | U$3.1 v43.65,99.69 43.65,95.78 v44.34,94.76 | U$4.1 41.42,107.05 42.12,106.35 44.97,106.35 45.61,106.99 | 45.61,106.99 45.93,107.31 45.93,107.83 R36.2 46.03,108.81 v46.24,108.97 | 45.61,106.99 46.24,106.99 46.88,106.35 46.88,105.72 46.09,104.92 v46.09,101.43 | v59.9,64.76 60.21,64.44 61.51,64.44 v61.72,64.81 | v54.66,89.68 59.1,89.68 59.58,90.16 59.58,92.7 v60.37,93.49
3.3V2  (via drill 0.3)
  Top 0.254: 84.22,70.14 91.65,70.16 92.12,70.16 92.12,67.94 91.65,67.94 91.65,66.74 IC5.19 91.66,64.77 91.81,64.44 95.77,64.44 v95.77,64.76 95.77,67.62 95.14,67.62 94.66,68.09 94.66,70.16 94.34,70.48 94.34,74.6 94.5,74.76 95.84,74.76 IC5.31 95.88,74.76 96.89,74.76 97.04,74.92 97.04,77.3 94.19,80.16 92.28,80.16 92.23,80.21 R57.2 92.28,81.91 92.28,82.65 91.49,83.44 | U$9.24 90.17,90.05 v90.53,89.68 90.53,88.89 90.77,88.57 90.77,87.46 91.17,87.14 91.17,84.92 91.49,84.6 91.49,83.44 | v82.76,84.29 84.75,84.29 R70.1 R62.1 R69.1 88.02,83.47 88.63,82.86 90.91,82.86 91.49,83.44 | v80.22,94.76 R74.2 | C39.2 77.15,89.79 77.04,89.68 77.04,87.78 77.52,87.3 77.52,84.92 v80.38,82.22 | v82.12,108.97 82.6,109.05 v83.39,109.69 | v81.96,101.43 81.27,101.43 v79.52,99.69 | JP7.2 105.3,79.89 105.3,70.48 104.5,69.68 103.71,69.68 103.23,69.21 103.23,66.03 101.65,64.44 97.84,64.44 v97.6,64.81 97.5,65.09 97.2,65.71 97.2,67.62 97.36,67.78 R67.2 | v96.25,93.49 95.25,93.49 C36.2
  Top 0.305: R74.2 79.38,93.44 IC6.3
  Top 0.406: IC5.9 84.22,70.14 81.89,70.14 | 81.89,70.14 C32.1 | 81.89,70.14 81.89,71.45 C34.1
  Top 0.61: C39.2 78.47,92.87 IC6.3
  Bottom 0.254: v82.76,84.29 82.76,81.43 82.28,80.95 JP9.1 80.38,81.03 v80.38,82.22 | R66.2 R64.2 82.6,110.48 v83.39,109.69 | U$7.1 v79.52,99.69 79.52,95.78 v80.22,94.76 | U$8.1 77.3,107.05 77.99,106.35 80.85,106.35 81.49,106.99 | 81.49,106.99 81.8,107.31 81.8,107.83 R65.2 81.91,108.81 v82.12,108.97 | 81.49,106.99 82.12,106.99 82.76,106.35 82.76,105.72 81.96,104.92 v81.96,101.43 | v95.77,64.76 96.09,64.44 97.39,64.44 v97.6,64.81 | v90.53,89.68 94.98,89.68 95.46,90.16 95.46,92.7 v96.25,93.49
3.3V3  (via drill 0.3)
  Top 0.254: 11.83,6.32 19.26,6.34 19.73,6.34 19.73,4.12 19.26,4.12 19.26,2.92 IC7.19 19.27,0.96 19.41,0.63 23.38,0.63 v23.38,0.94 23.38,3.8 22.75,3.8 22.27,4.28 22.27,6.34 21.95,6.66 21.95,10.79 22.11,10.94 23.45,10.94 IC7.31 23.49,10.94 24.5,10.94 24.65,11.1 24.65,13.48 21.8,16.34 19.89,16.34 19.84,16.39 R88.2 19.89,18.09 19.89,18.83 19.1,19.62 | U$12.24 17.78,26.23 v18.14,25.87 18.14,25.07 18.38,24.76 18.38,23.64 18.78,23.17 18.78,20.95 19.1,20.79 19.1,19.62 | v10.37,20.47 12.36,20.47 R104.1 R93.1 R102.1 15.63,19.65 16.24,19.04 18.52,19.04 19.1,19.62 | v7.83,30.95 R111.2 | C56.2 4.76,25.97 4.65,25.87 4.65,23.96 5.13,23.49 5.13,21.1 v7.99,18.41 | v9.73,45.15 10.21,45.23 v11,45.87 | v9.57,37.61 8.88,37.61 v7.13,35.87 | JP10.2 32.91,16.07 32.91,6.66 32.11,5.86 31.32,5.86 30.84,5.39 30.84,2.21 29.26,0.63 25.45,0.63 v25.21,0.99 25.11,1.27 24.81,1.9 24.81,3.8 24.98,3.96 R98.2 | v23.86,29.68 22.86,29.68 C53.2
  Top 0.305: R111.2 6.99,29.62 IC8.3
  Top 0.406: IC7.9 11.83,6.32 9.5,6.32 | 9.5,6.32 C50.1 | 9.5,6.32 9.5,7.63 C51.1
  Top 0.61: C56.2 6.08,29.05 IC8.3
  Bottom 0.254: v10.37,20.47 10.37,17.61 9.89,17.14 JP12.1 7.99,17.21 v7.99,18.41 | R96.2 R94.2 10.21,46.66 v11,45.87 | U$10.1 v7.13,35.87 7.13,31.96 v7.83,30.95 | U$11.1 4.9,43.23 5.6,42.54 8.46,42.54 9.1,43.17 | 9.1,43.17 9.41,43.49 9.41,44.02 R95.2 9.52,45 v9.73,45.15 | 9.1,43.17 9.73,43.17 10.37,42.54 10.37,41.9 9.57,41.11 v9.57,37.61 | v23.38,0.94 23.7,0.63 25,0.63 v25.21,0.99 | v18.14,25.87 22.59,25.87 23.07,26.34 23.07,28.88 v23.86,29.68
3.3V4  (via drill 0.3)
  Top 0.254: 48.34,6.32 55.77,6.34 56.24,6.34 56.24,4.12 55.77,4.12 55.77,2.92 IC9.19 55.78,0.96 55.93,0.63 59.9,0.63 v59.9,0.94 59.9,3.8 59.26,3.8 58.78,4.28 58.78,6.34 58.47,6.66 58.47,10.79 58.63,10.94 59.96,10.94 IC9.31 60,10.94 61.01,10.94 61.17,11.1 61.17,13.48 58.31,16.34 56.4,16.34 56.35,16.39 R124.2 56.4,18.09 56.4,18.83 55.61,19.62 | U$15.24 54.3,26.23 v54.66,25.87 54.66,25.07 54.9,24.76 54.9,23.64 55.29,23.33 55.29,21.1 55.61,20.79 55.61,19.62 | v46.88,20.47 48.87,20.47 R136.1 R129.1 R135.1 52.14,19.65 52.75,19.04 55.03,19.04 55.61,19.62 | v44.34,30.95 R140.2 | C70.2 41.27,25.97 41.16,25.87 41.16,23.96 41.64,23.49 41.64,21.1 v44.5,18.41 | v46.24,45.15 46.72,45.23 v47.51,45.87 | v46.09,37.61 45.39,37.61 v43.65,35.87 | JP13.2 69.42,16.07 69.42,6.66 68.63,5.86 67.83,5.86 67.36,5.39 67.36,2.21 65.77,0.63 61.96,0.63 v61.72,0.99 61.62,1.27 61.33,1.9 61.33,3.8 61.49,3.96 R133.2 | v60.37,29.68 59.37,29.68 C67.2
  Top 0.305: R140.2 43.51,29.62 IC10.3